# Altium PCB JUNORPCFrontv3.PcbDoc (part 1 of 2)
Units mil, origin at the board's own origin, x right, y up, seen from the top; angles counter-clockwise.
Board outline 3967.04 x 3967.04 mil, 8 copper layers (Top Layer, Internal Plane 1, Signal Layer 1, Internal Plane 2, Signal Layer 2, Internal Plane 3, Internal Plane 4, Bottom Layer), stack 66.304 mil thick; 289 components, 182 nets, 1049 pads, 357 vias.
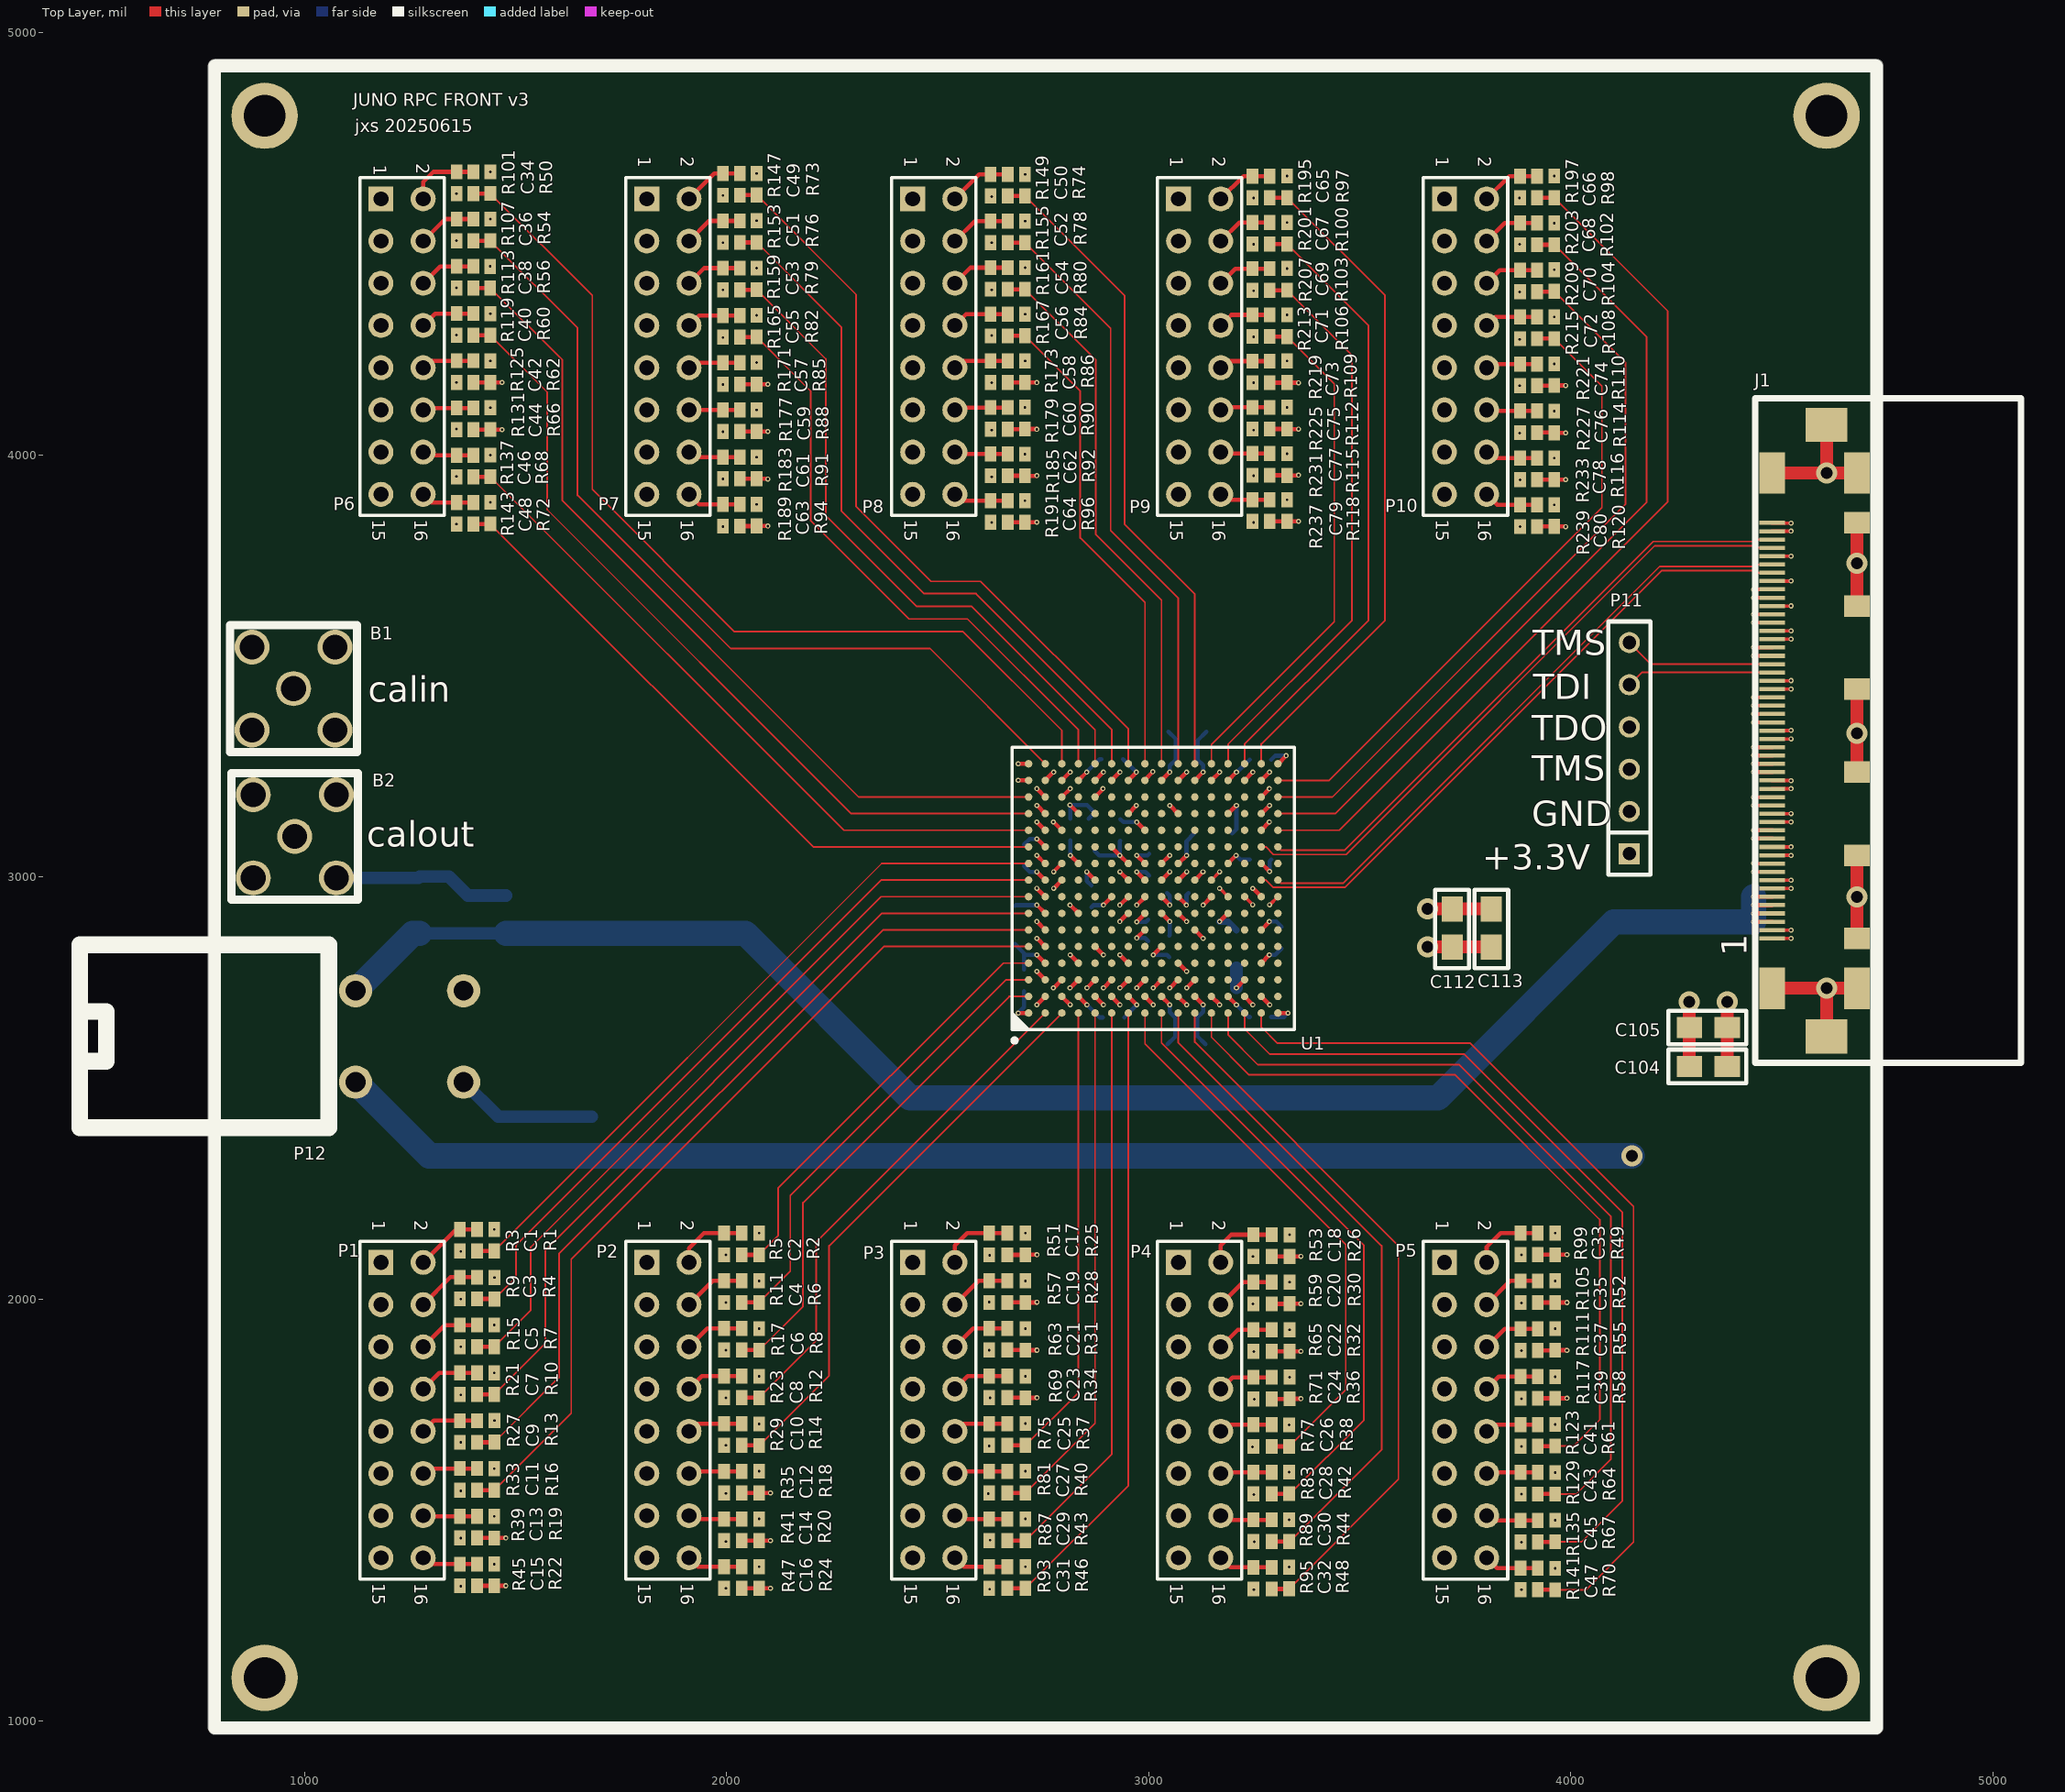
[diagram p0: Top Layer view]
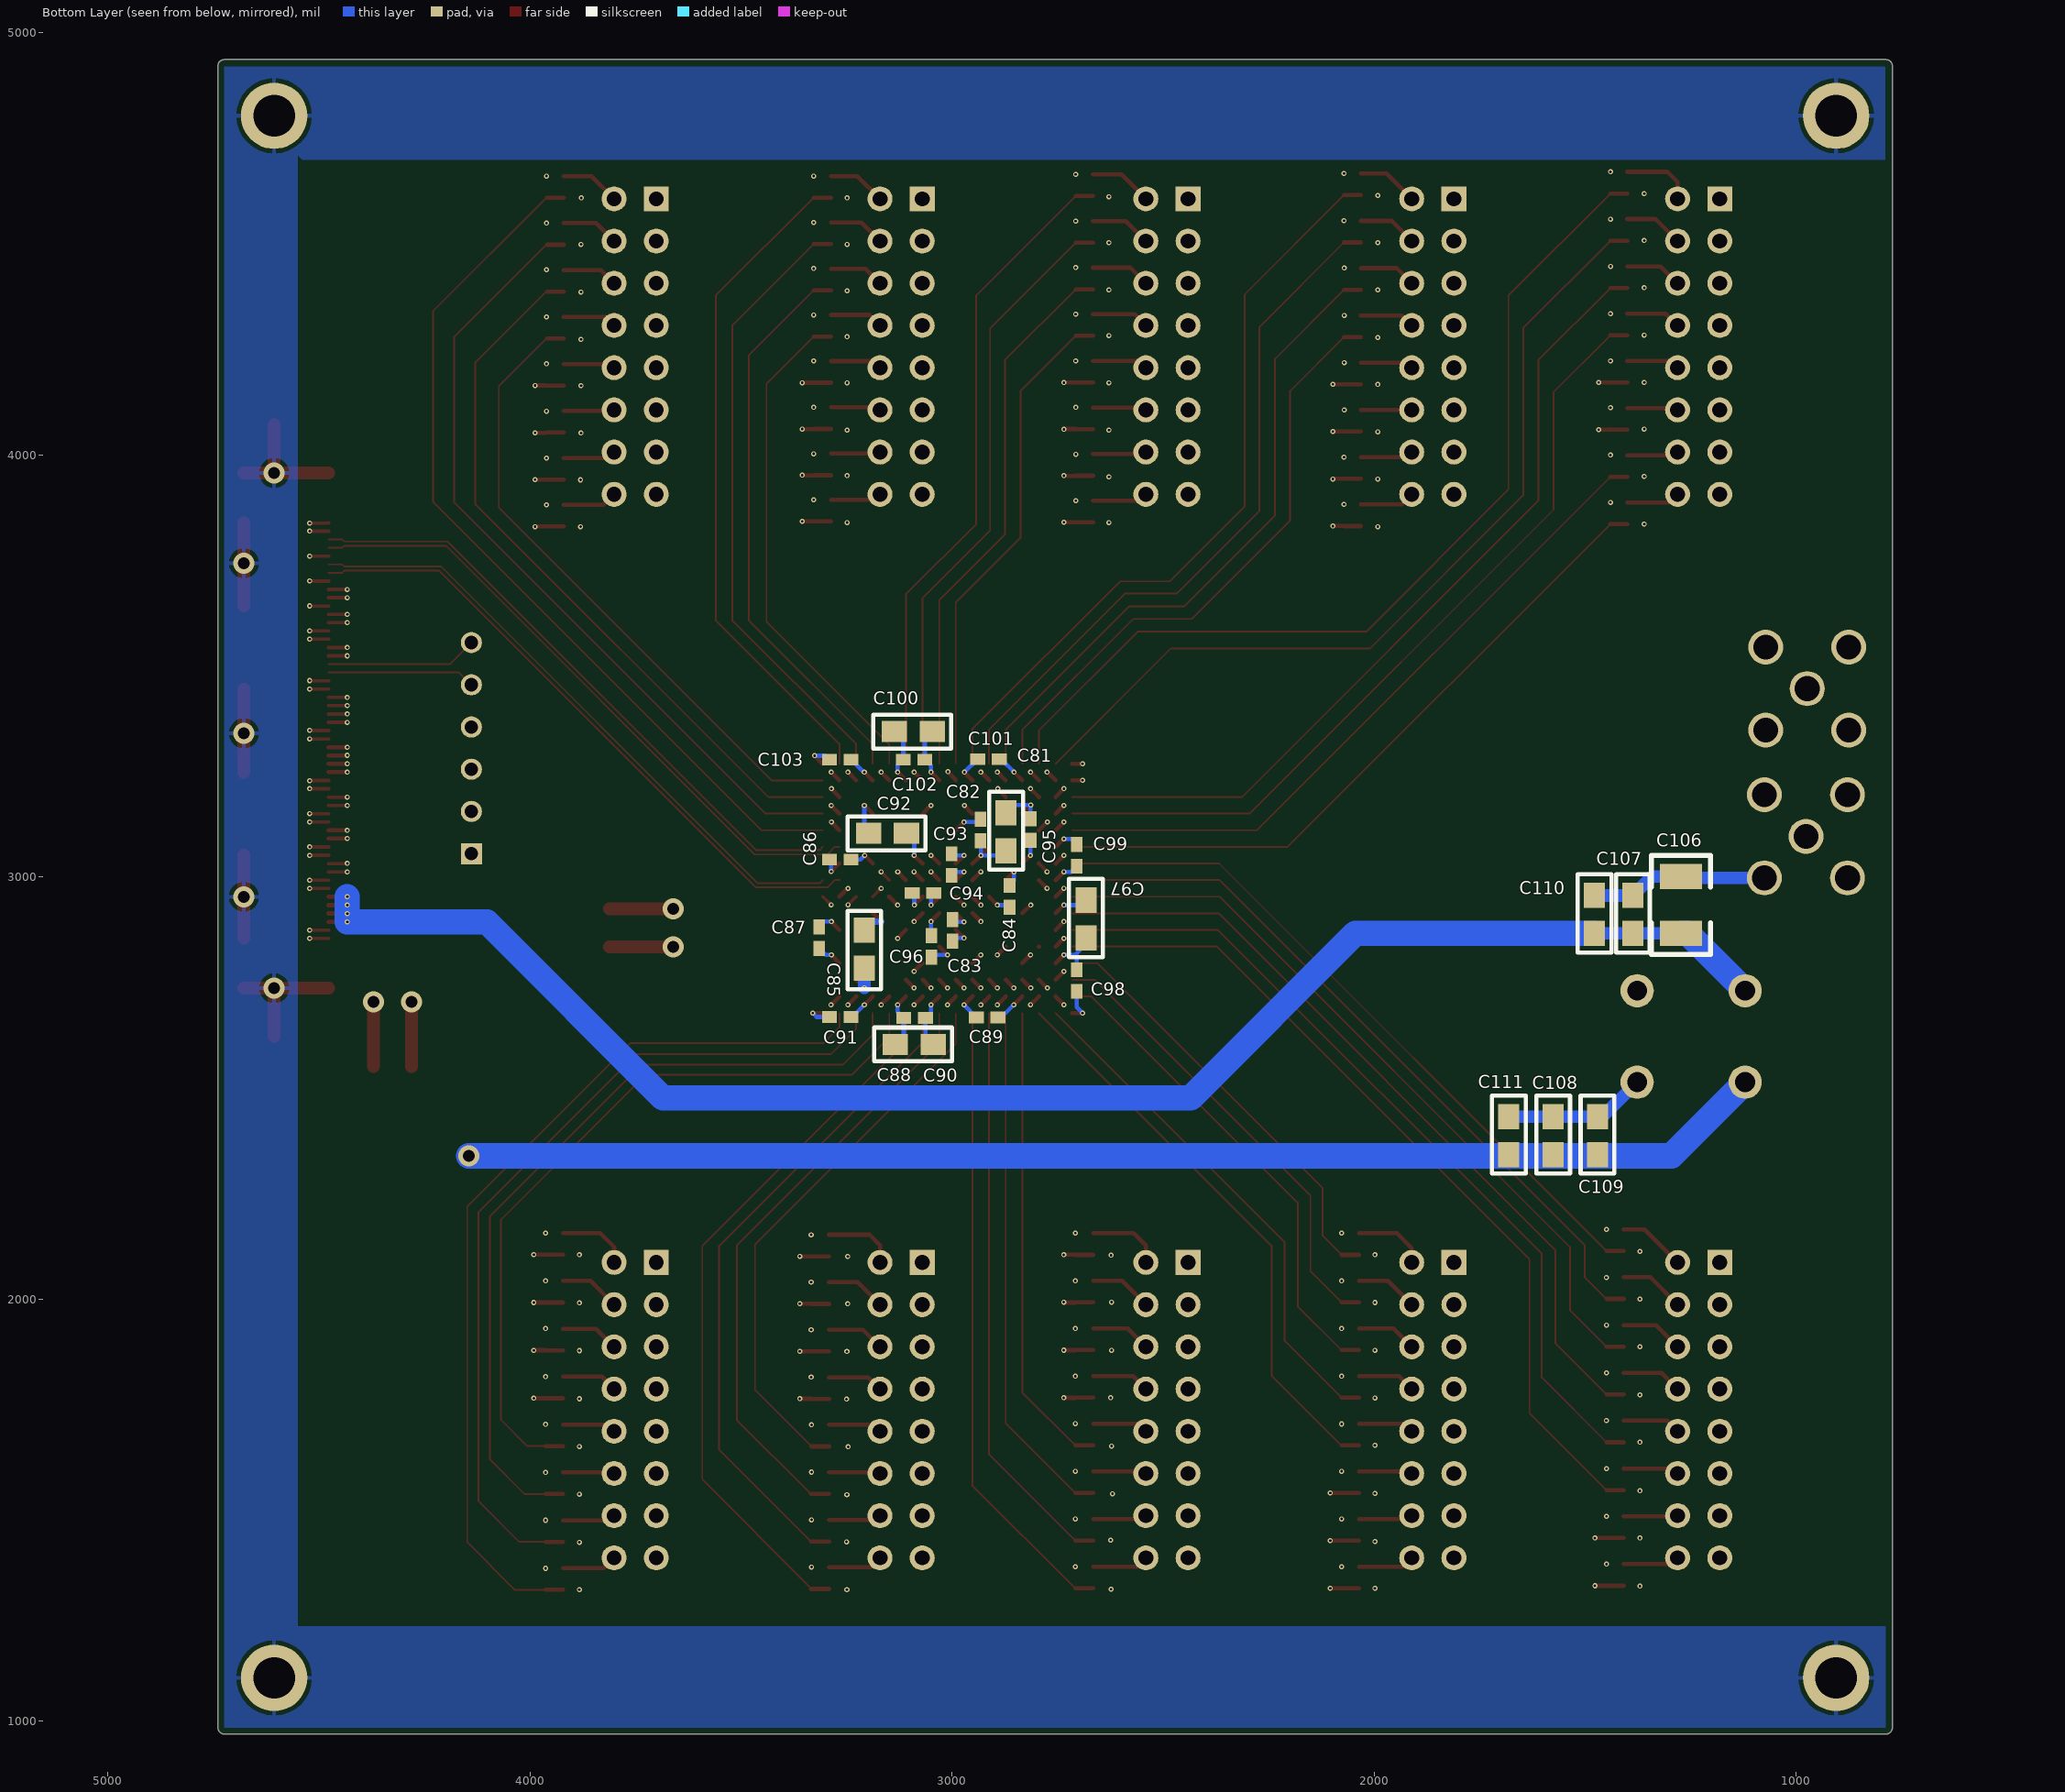
[diagram p1: Bottom Layer view, seen from below]
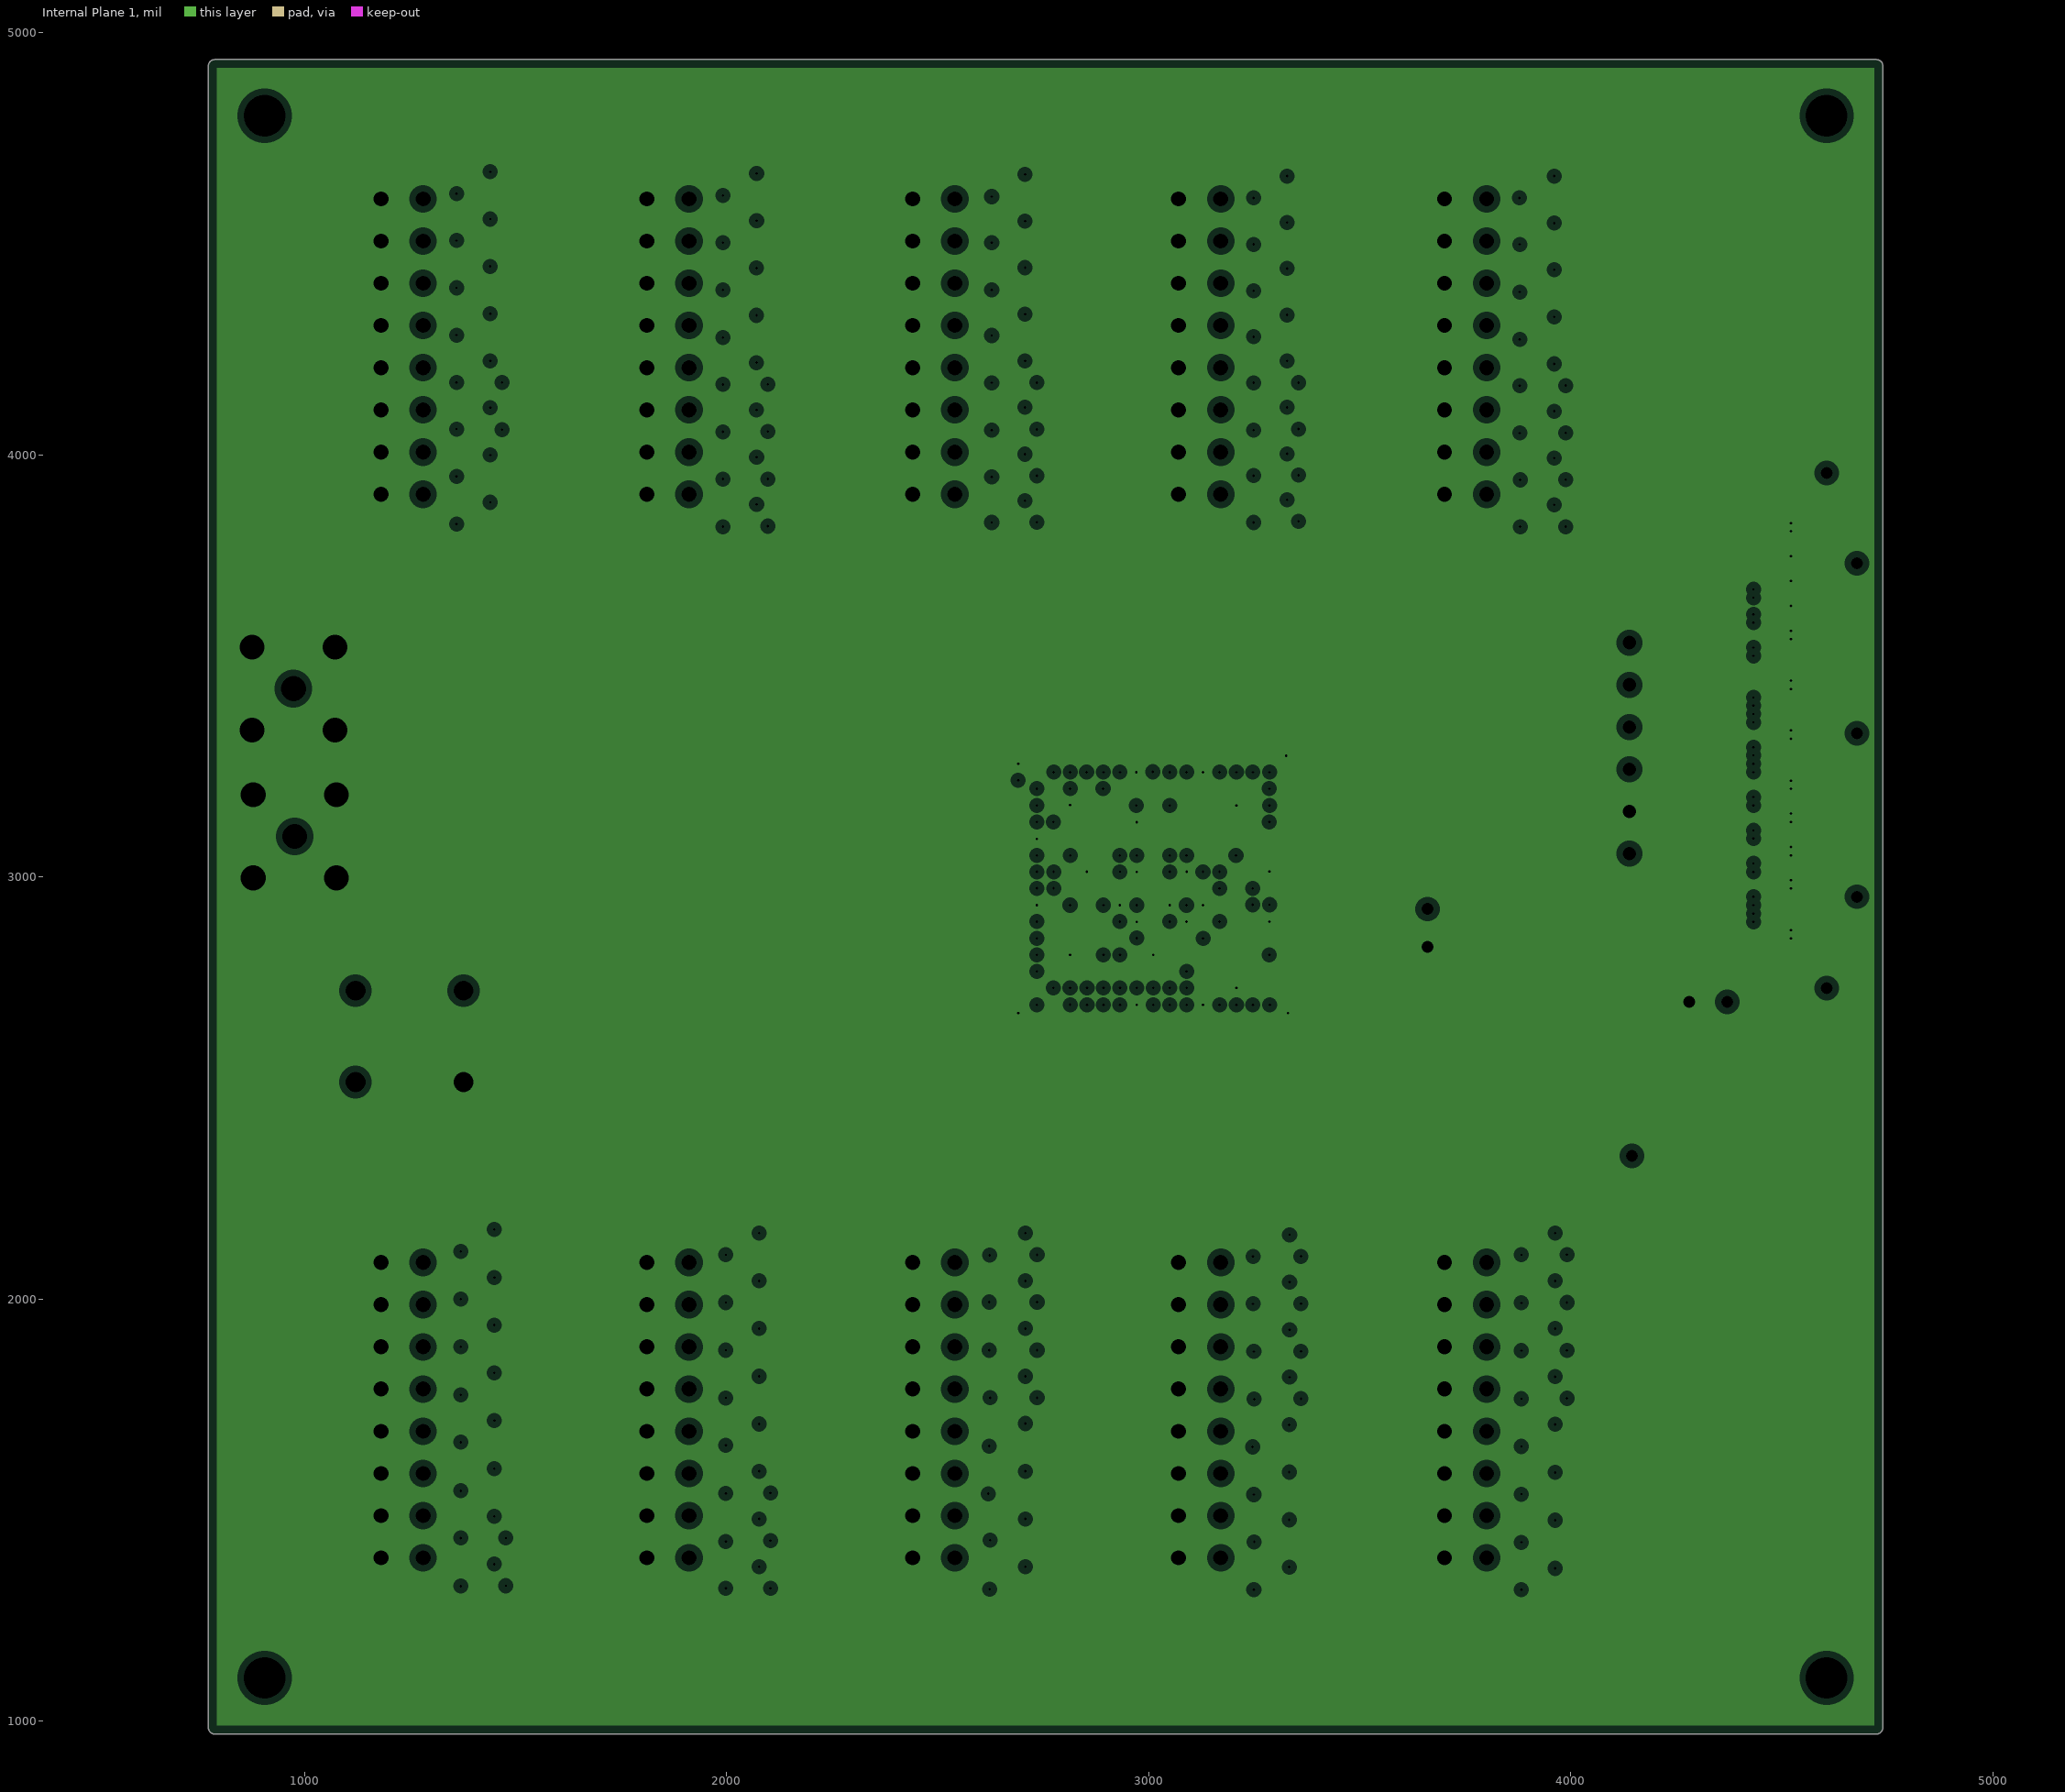
[diagram p2: Internal Plane 1, clearances drawn from the general rule]
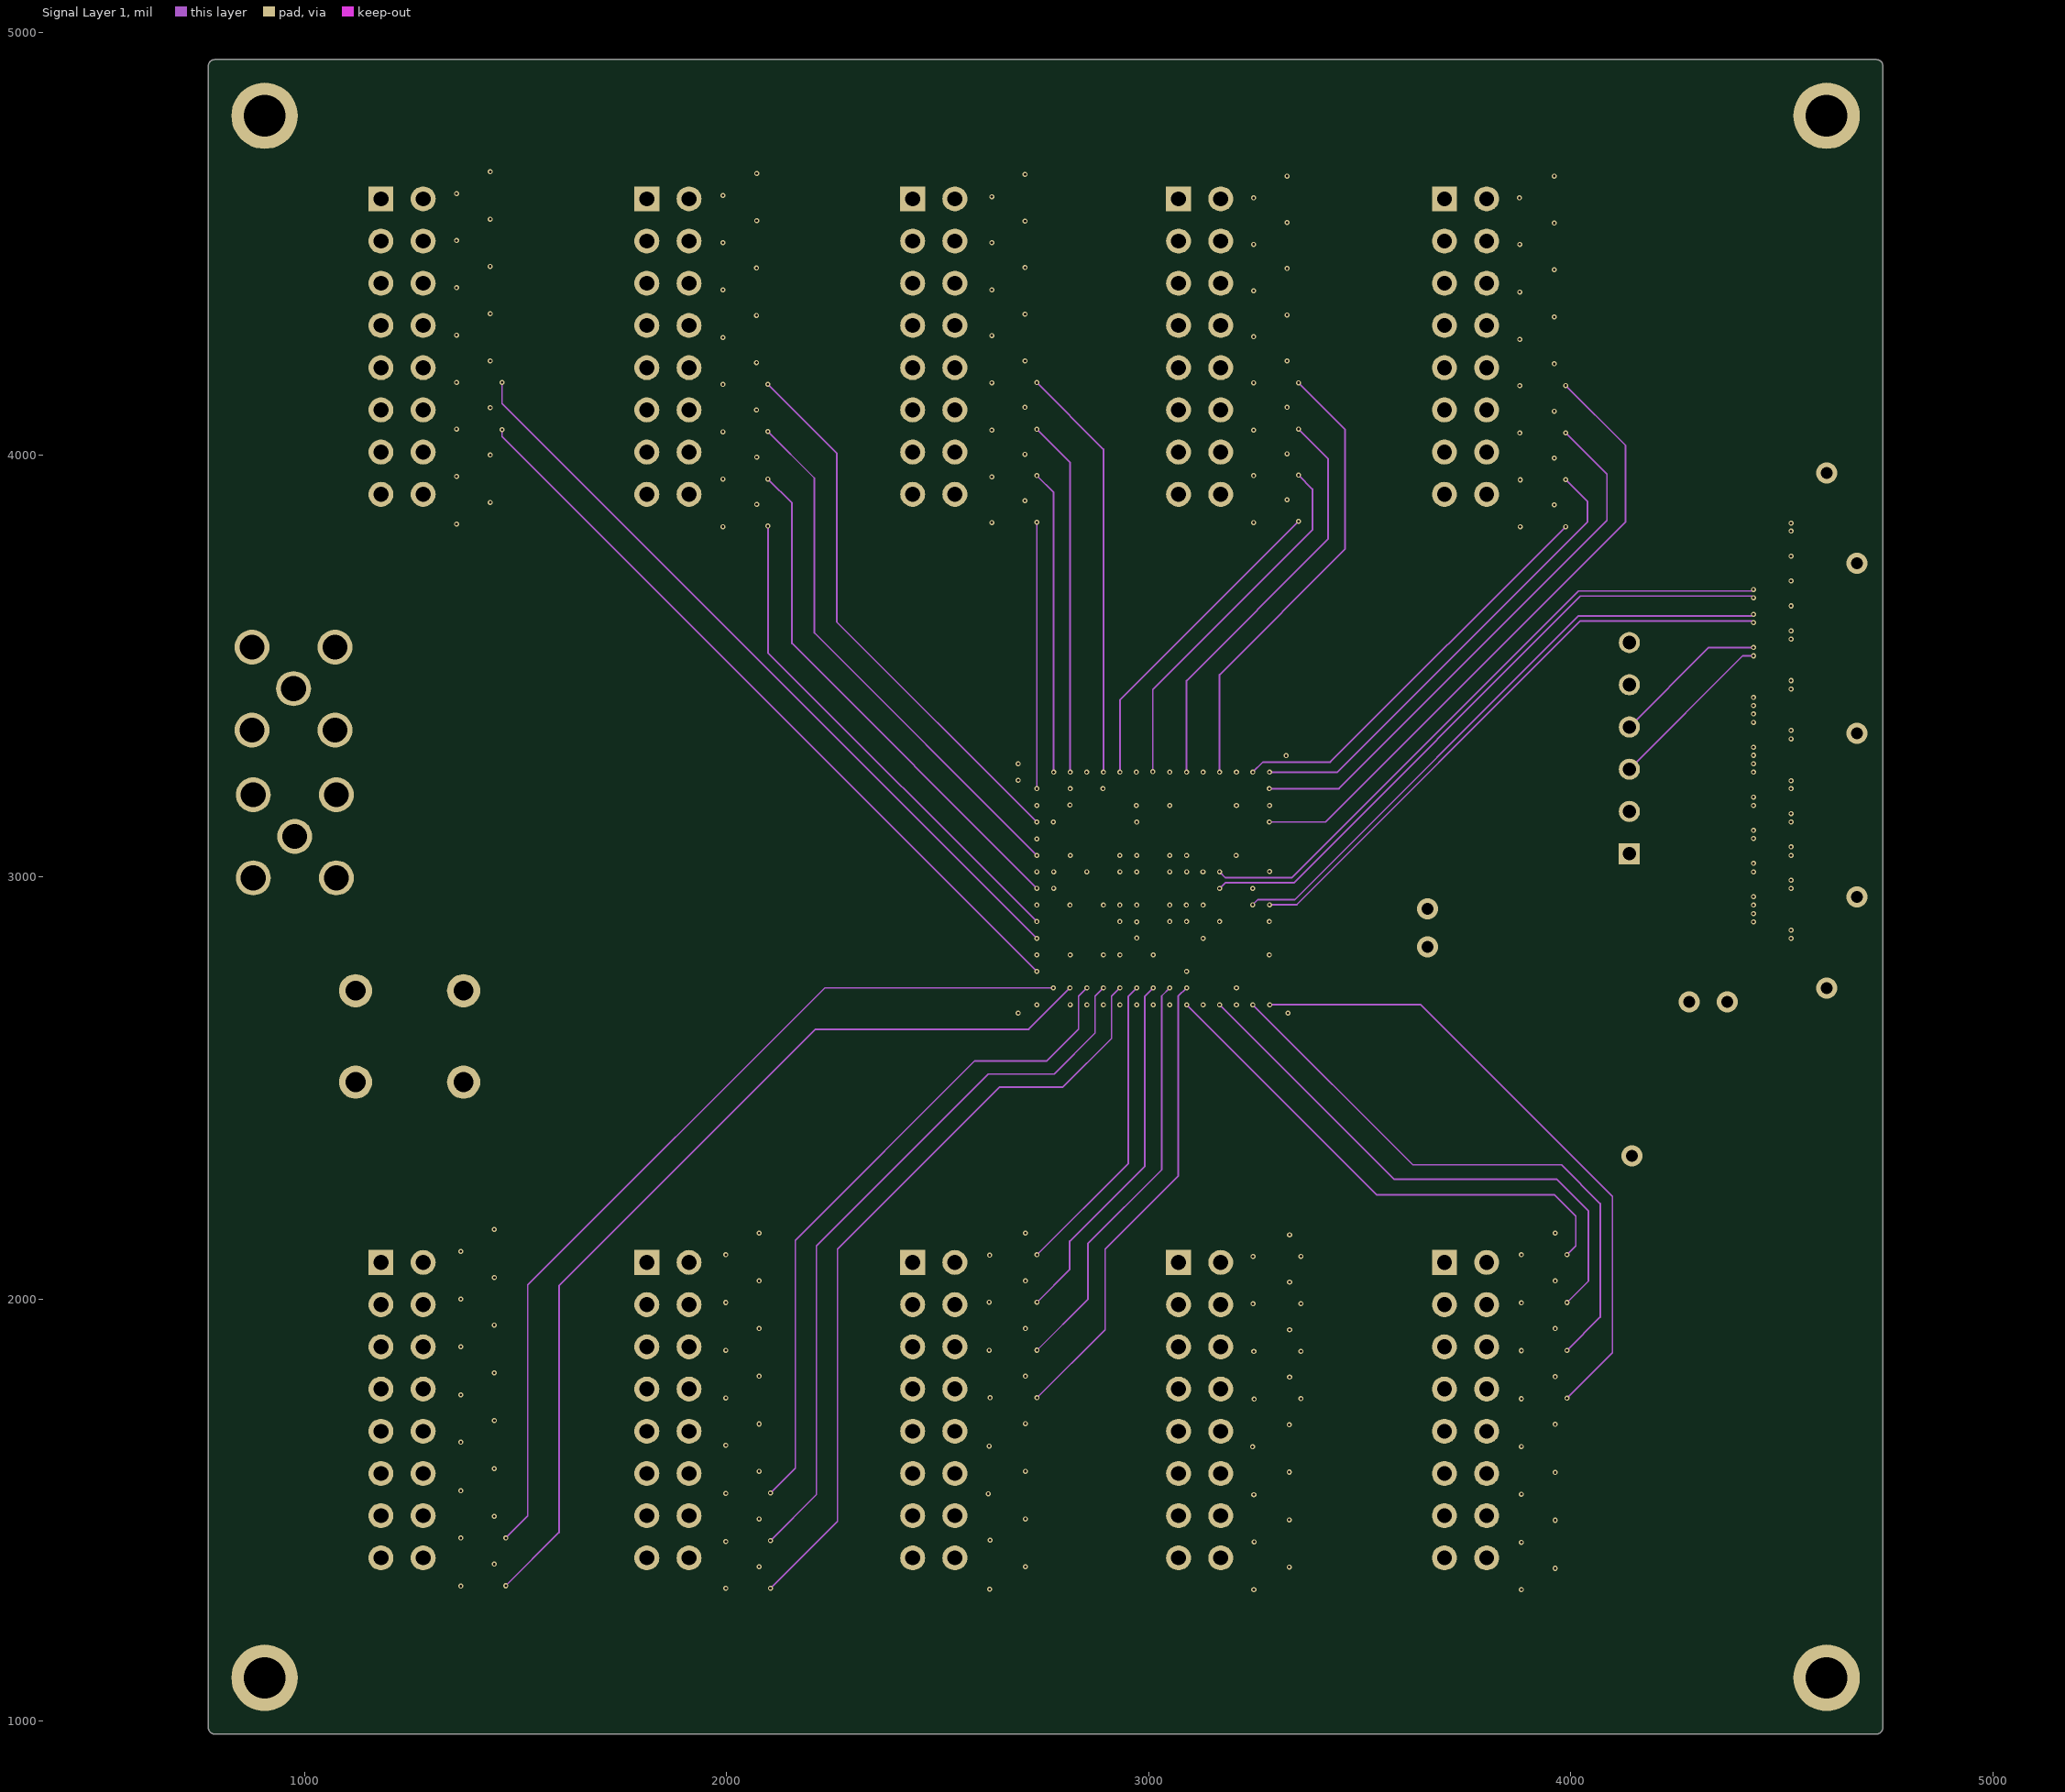
[diagram p3: Signal Layer 1]
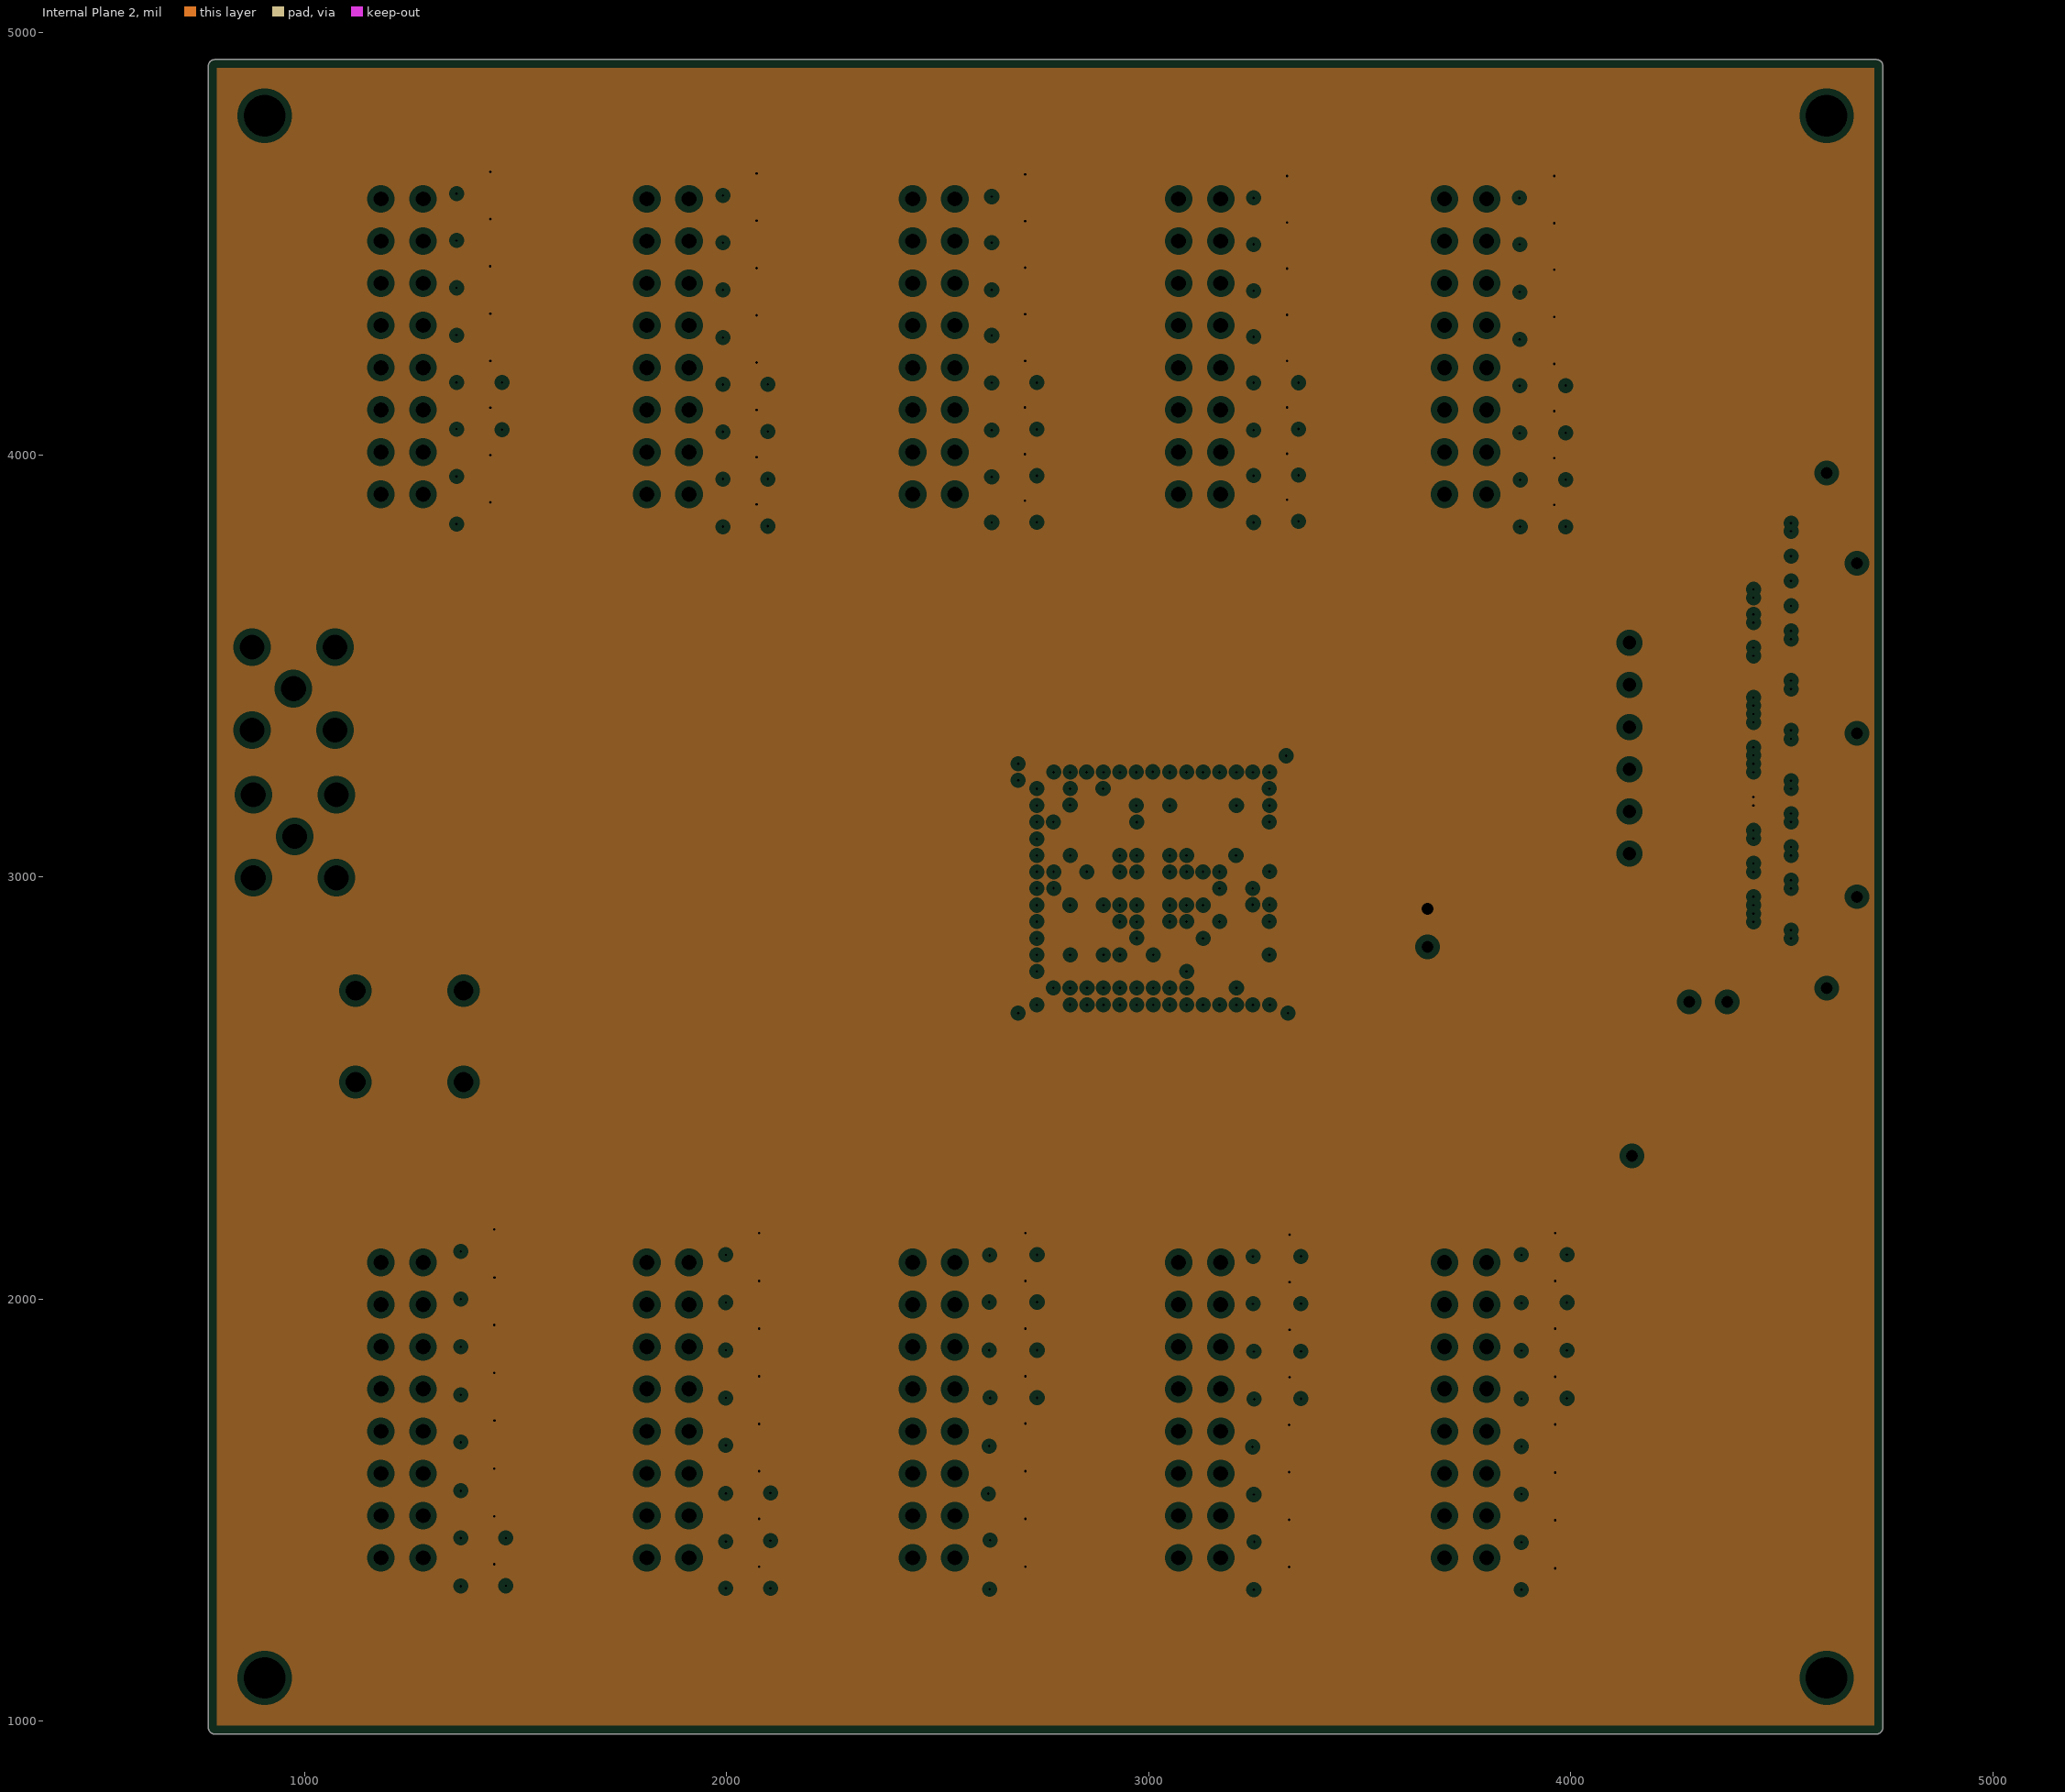
[diagram p4: Internal Plane 2, clearances drawn from the general rule]
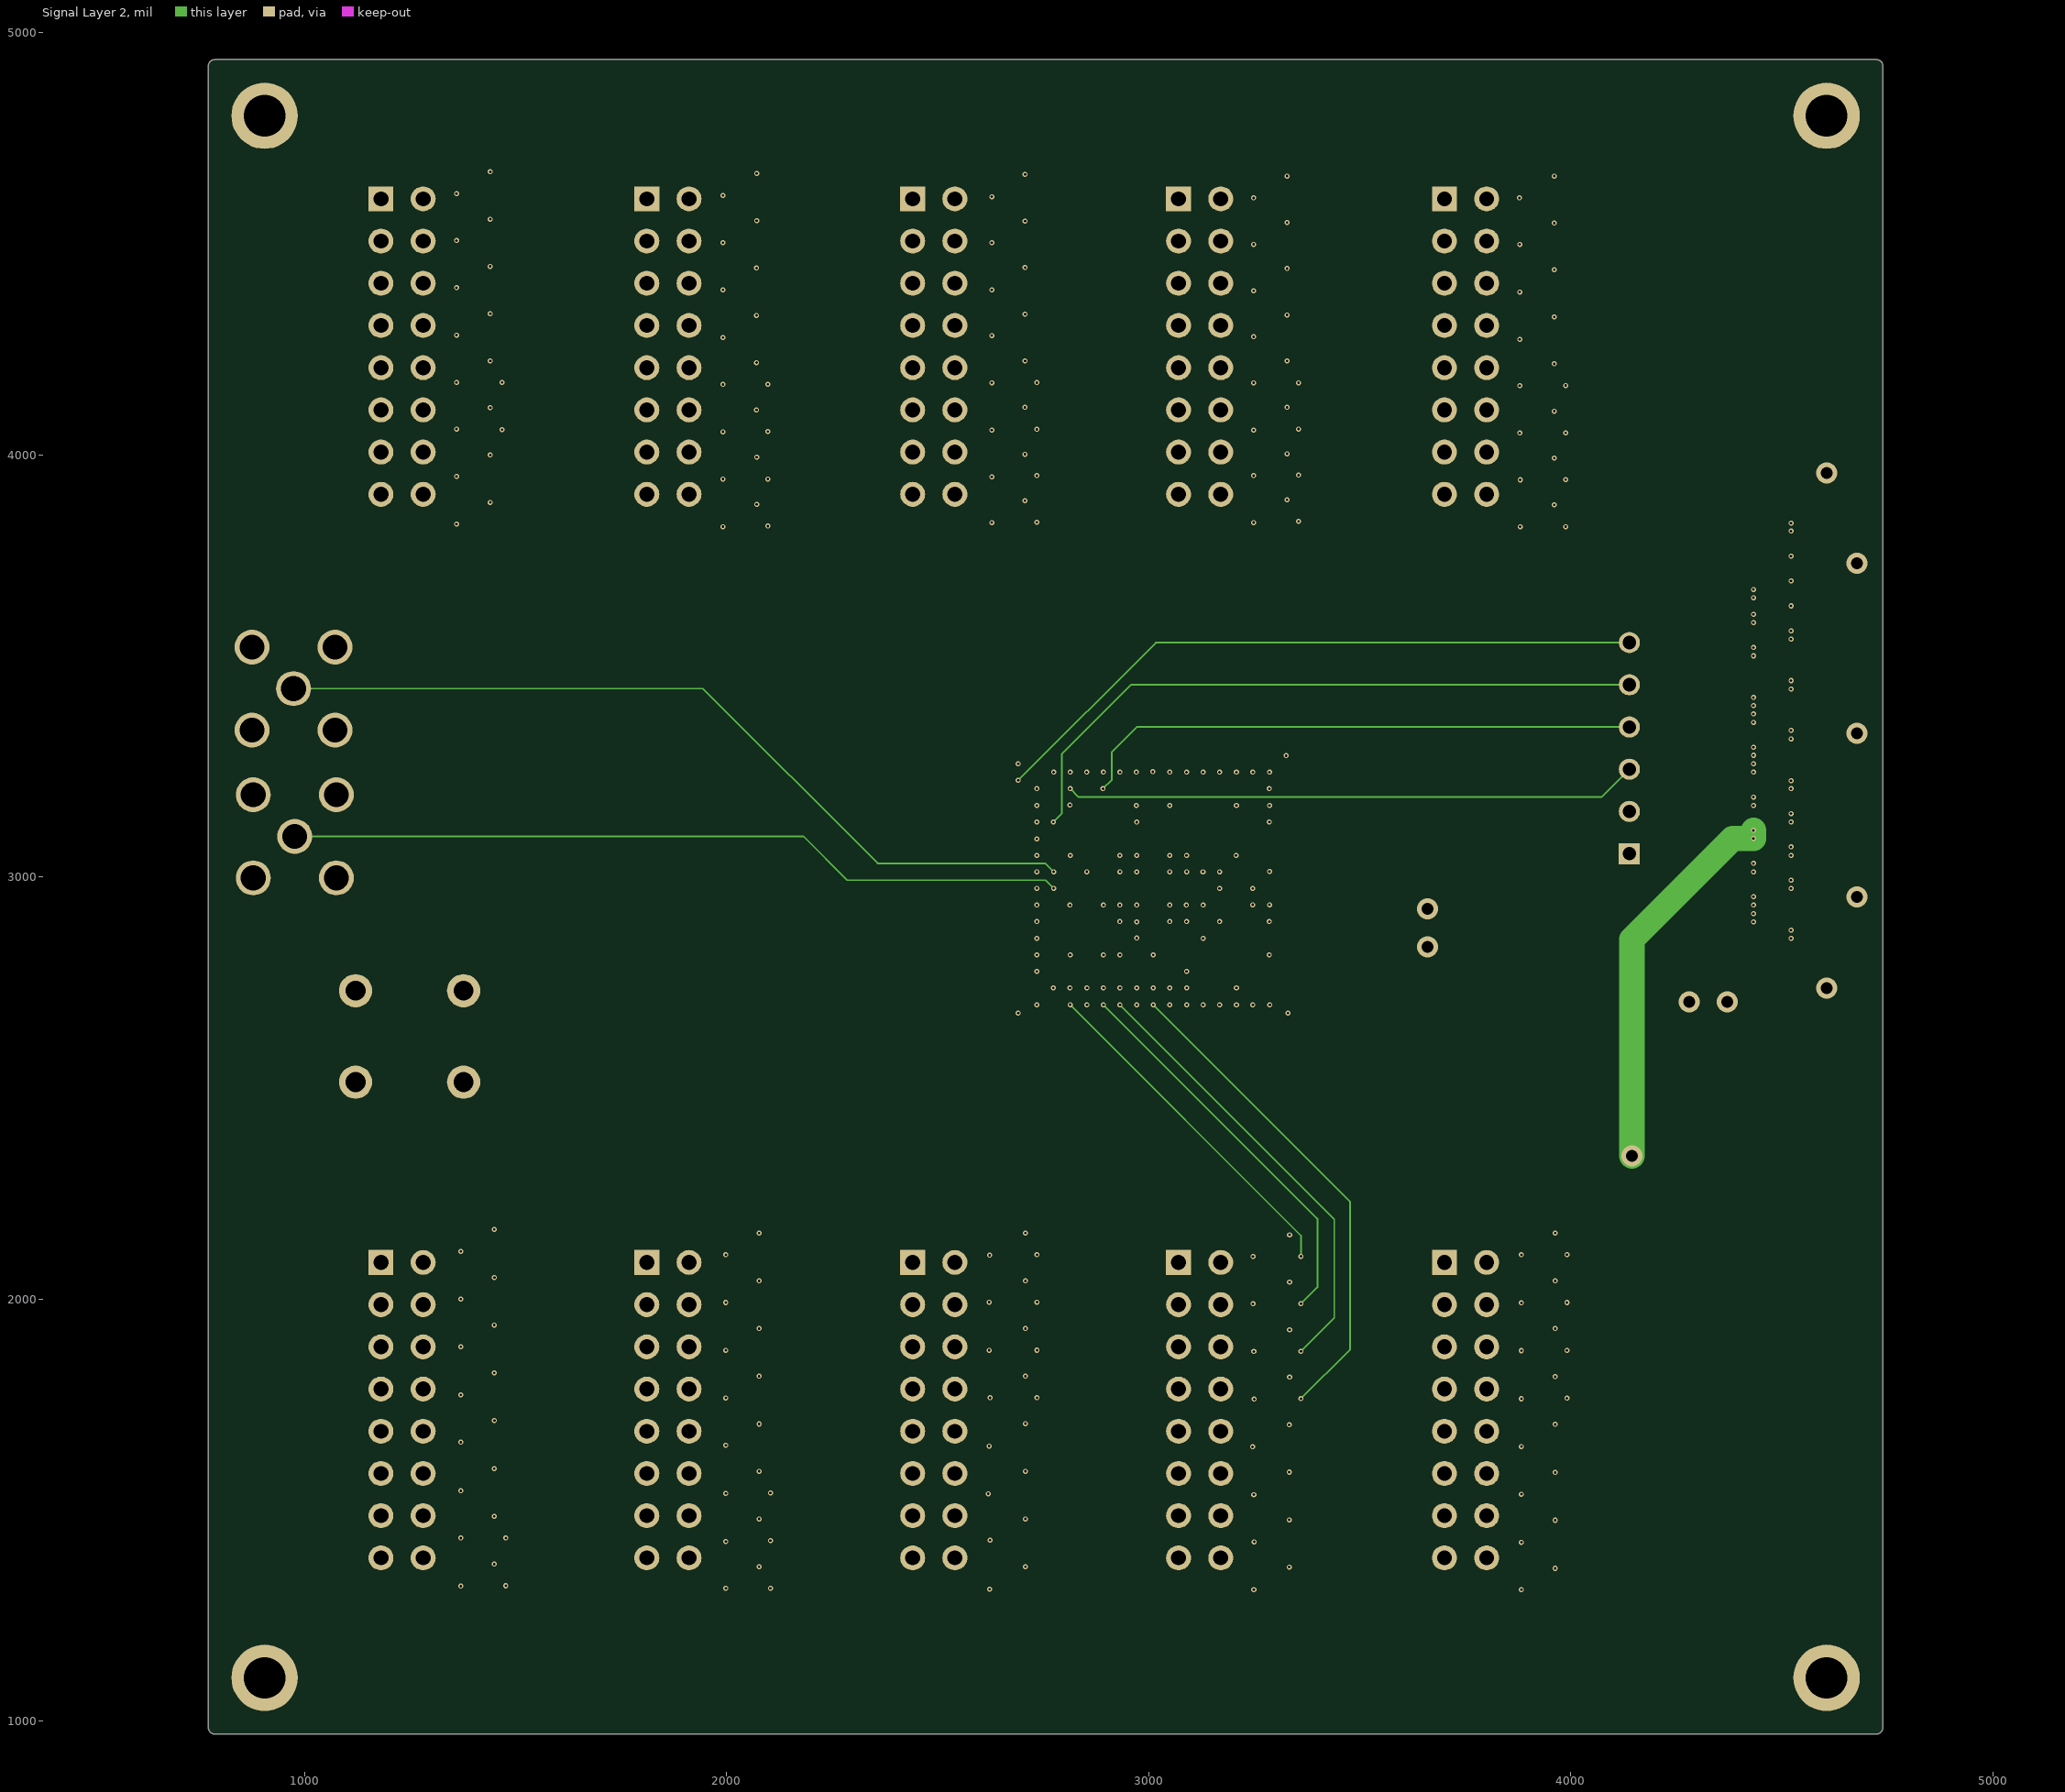
[diagram p5: Signal Layer 2]
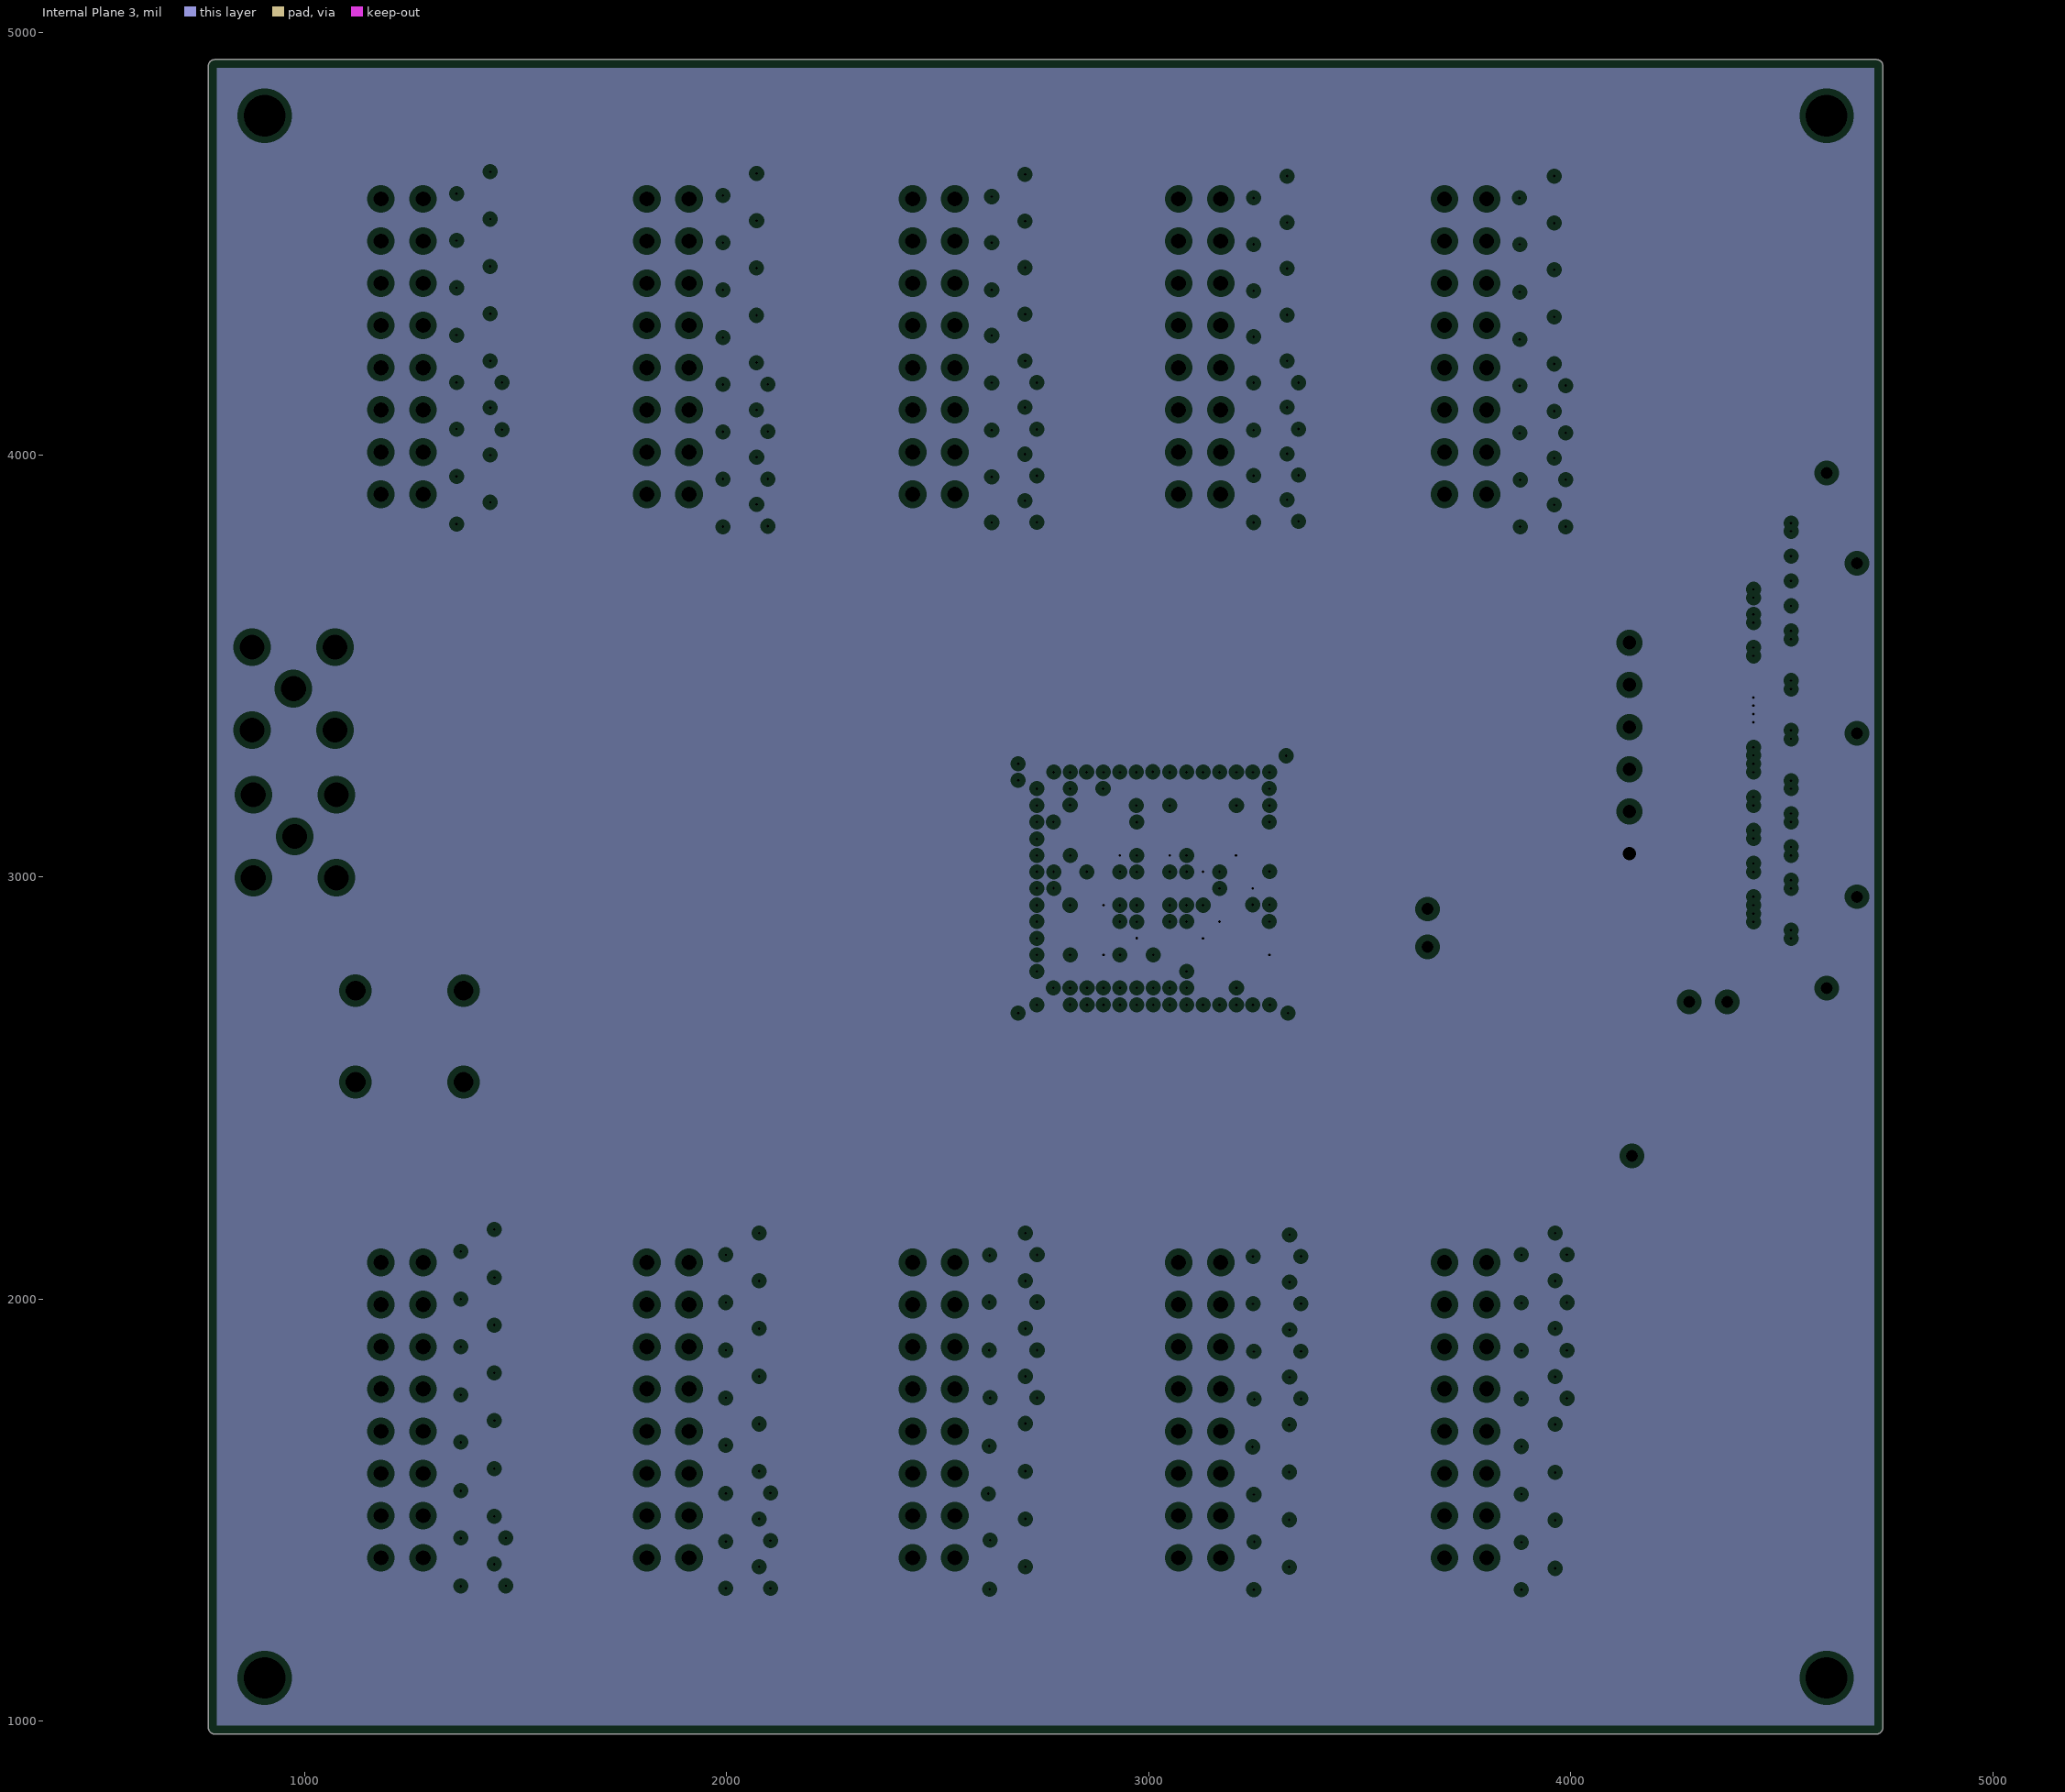
[diagram p6: Internal Plane 3, clearances drawn from the general rule]
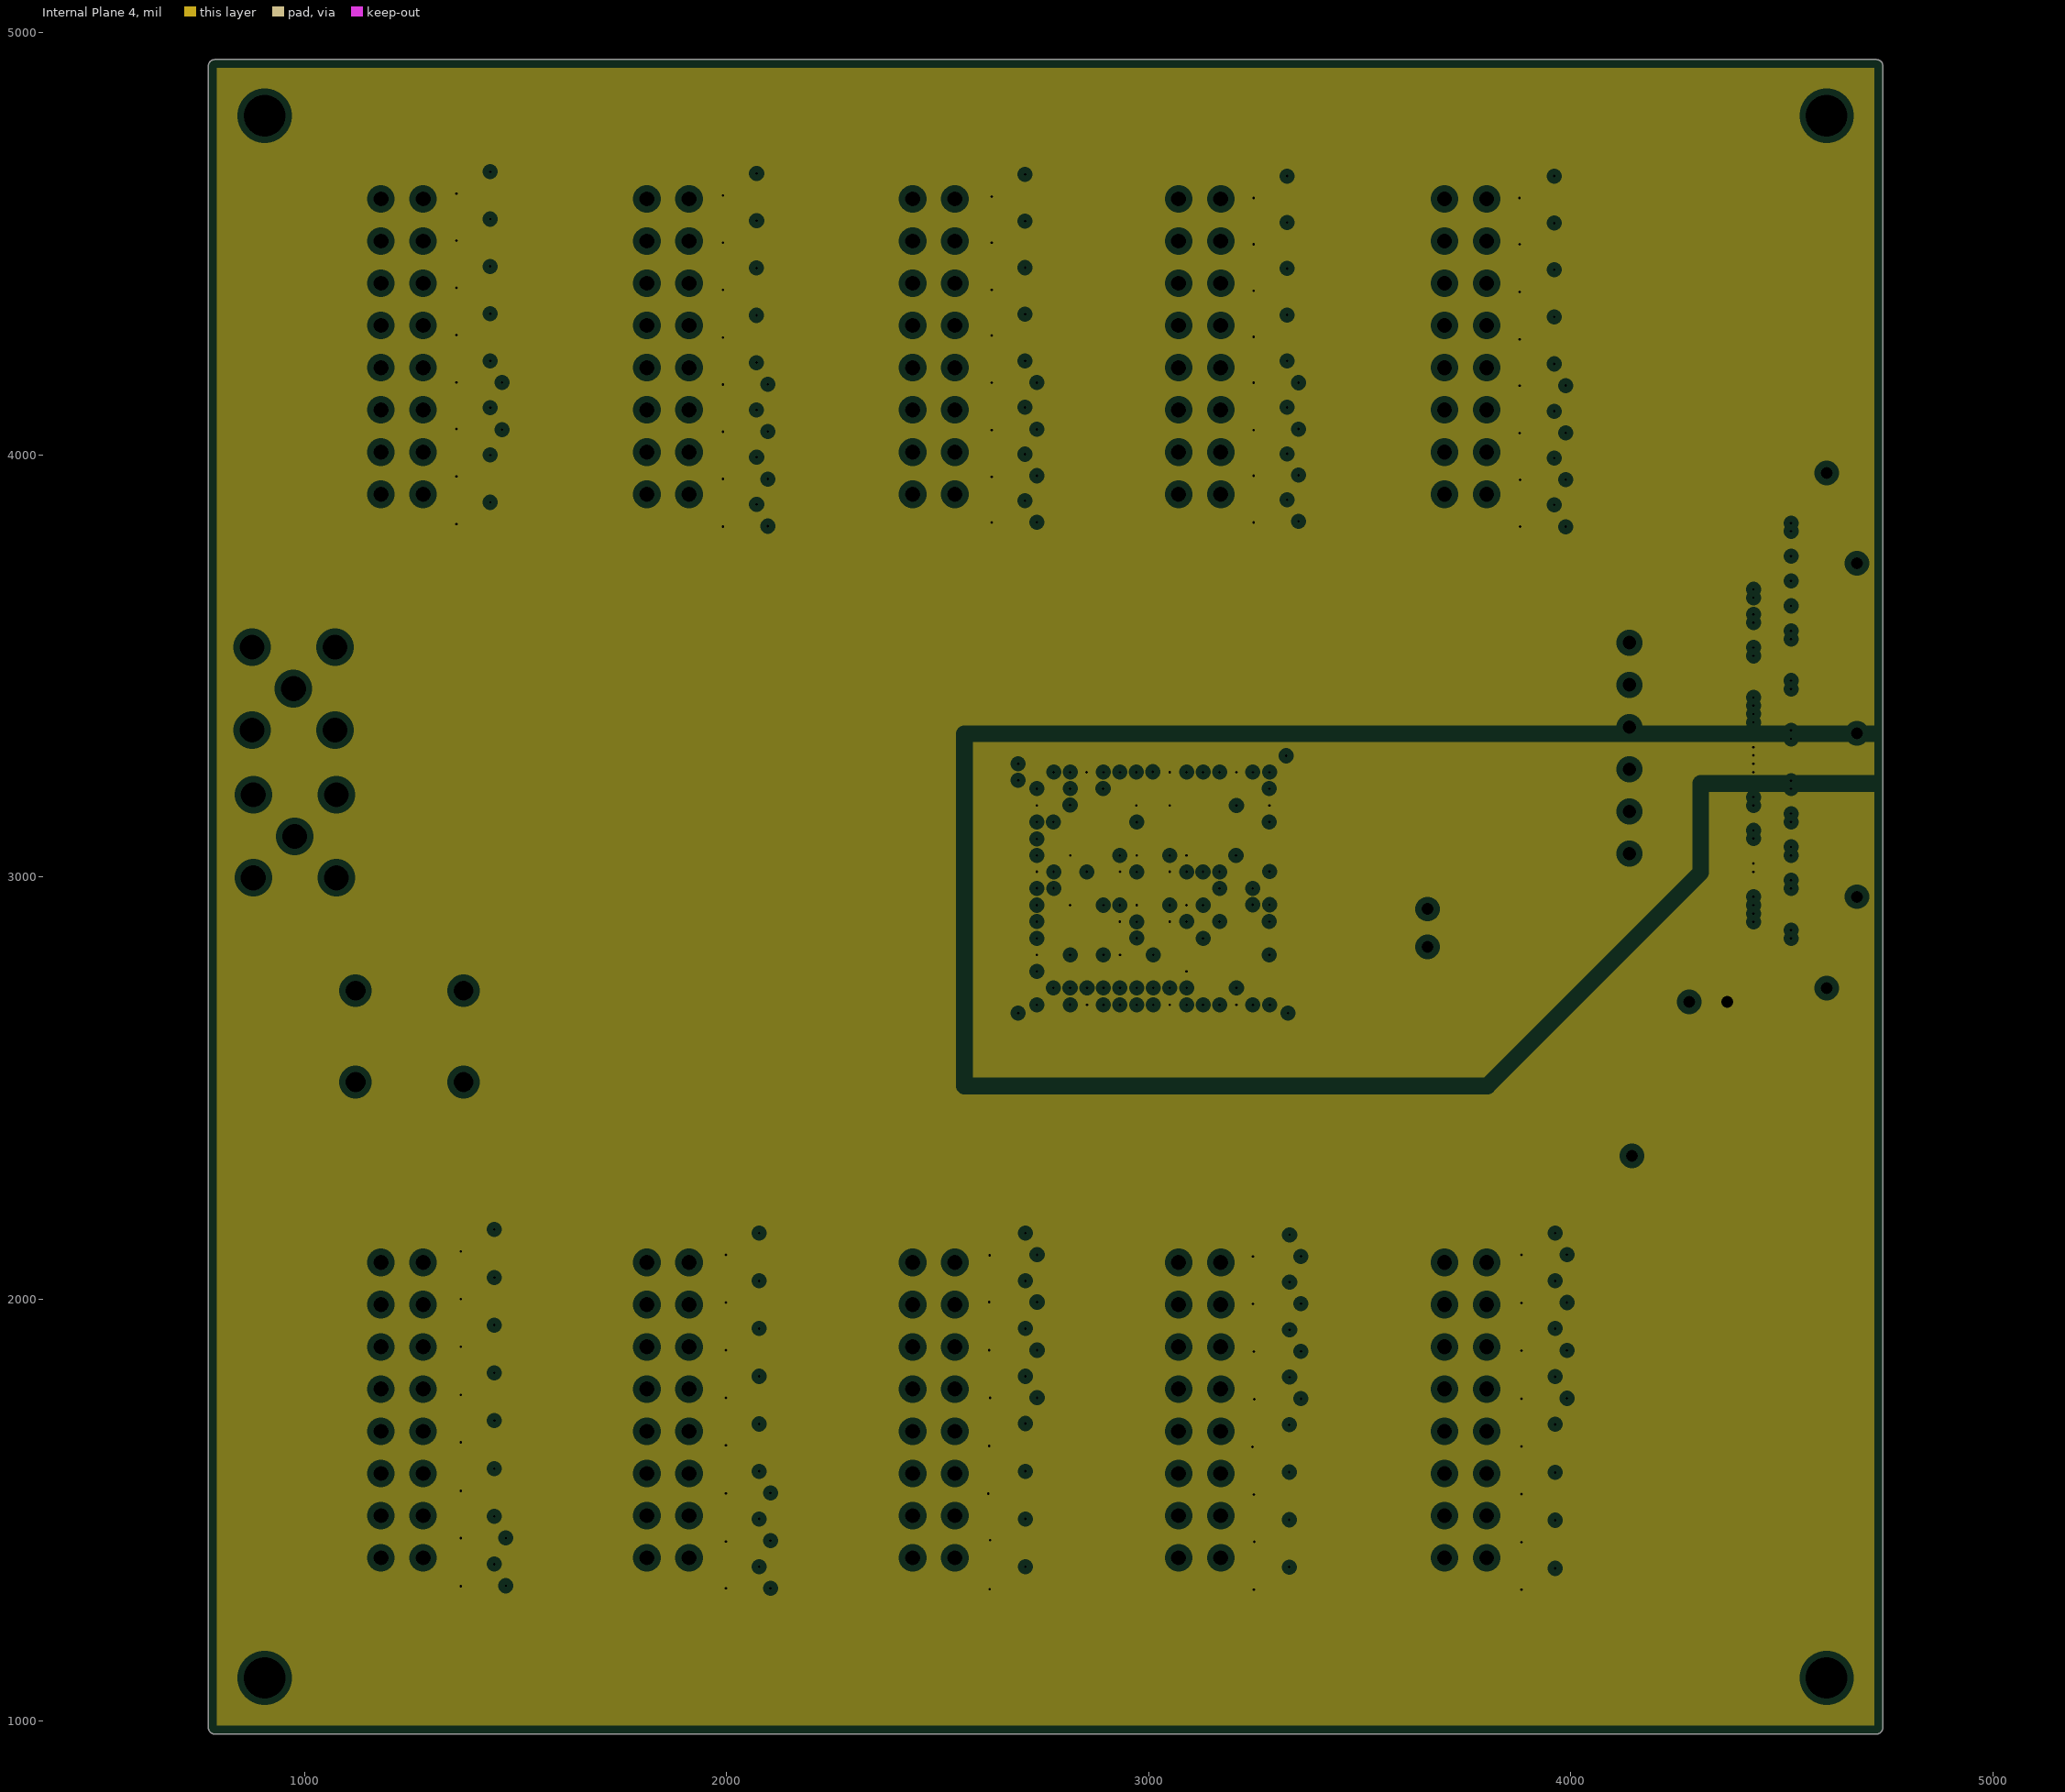
[diagram p7: Internal Plane 4, clearances drawn from the general rule]

## Layer stack, top to bottom
Top Solder: solder mask 0.4, Solder Resist, Dk 3.5
Top Layer: signal copper 1.4
Dielectric 1: core 10, FR-4, Dk 4.2
Internal Plane 1: plane copper 1.4173, net GND
Dielectric 3: prepreg 5, Dk 4.2
Signal Layer 1: signal copper 1.4173
Dielectric 4: core 10, Dk 4.2
Internal Plane 2: plane copper 1.4173, net Vbaseline
Dielectric 6: prepreg 5, Dk 4.2
Signal Layer 2: signal copper 1.4173
Dielectric 5: core 10, Dk 4.2
Internal Plane 3: plane copper 1.4173, net +3.3V
Dielectric 7: prepreg 5, Dk 4.2
Internal Plane 4: plane copper 1.4173, net -5.2V
Dielectric 2: core 10, Dk 4.2
Bottom Layer: signal copper 1.4
Bottom Solder: solder mask 0.4, Solder Resist, Dk 3.5

## Board outline
787.4,969.24 cw(c787.4,984.25) 772.39,984.25 772.39,4921.26 cw(c787.4,4921.26) 787.4,4936.27 4724.41,4936.27 cw(c4724.41,4921.26) 4739.42,4921.26 4739.42,984.25 cw(c4724.41,984.25) 4724.41,969.24

## Design rules (kind name [scope] priority, off if disabled: settings)
Clearance [All] p1: gap=0 ignorepadtopadclearanceinfootprint=FALSE
ComponentClearance [All] p1: gap=0 collisioncheckmode=3 verticalgap=0 showdistances=FALSE
DiffPairsRouting [All] p1: maxlimit=10 minlimit=6 mostfreqgap=8 toplayer_prefgap=6 toplayer_minwidth=4 toplayer_maxwidth=15 toplayer_prefwidth=15 midlayer1_mingap=8 midlayer1_minwidth=4 midlayer1_maxwidth=15 midlayer1_prefwidth=15 midlayer2_mingap=8 midlayer2_minwidth=4 midlayer2_maxwidth=15 midlayer2_prefwidth=15 bottomlayer_prefgap=6 bottomlayer_minwidth=4 bottomlayer_maxwidth=15 bottomlayer_prefwidth=15 maxuncoupledlength=500
HoleToHoleClearance [All] p1: gap=0 allowstackedmicrovias=TRUE
MinimumSolderMaskSliver [All] p1: minsoldermaskwidth=0
PlaneClearance [All] p1: clearance=15
PlaneConnect [All] p1: planeconnectstyle=Direct reliefexpansion=20 reliefentries=4 reliefconductorwidth=10 reliefairgap=10
PolygonConnect [All] p1: connectstyle=Relief reliefconductorwidth=10 reliefentries=4 polygonreliefangle="90 Angle" airgapwidth=10
RoutingVias [All] p1: holewidth=6 width=12 viastyle="Through Hole" minholewidth=6 minwidth=12 maxholewidth=28 maxwidth=50
SilkToSilkClearance [All] p1: silktosilkclearance=0
SilkToSolderMaskClearance [IsPad] p1: minsilkscreentomaskgap=0 clearancetoexposedcopper=TRUE
SolderMaskExpansion [All] p1: expansion=4
Width [All] p1: maxlimit=100 minlimit=4 preferedwidth=10 minimp=50.000000 maximp=50.000000 favimp=50.000000
22 further rules are at their usual default settings.

## Classes and differential pairs
component class main: B1 B2 C104 C105 C106 C107 C108 C109 C110 C111 C112 C113 J1 P12
component class XC6SLX09-2FTG256C: C81 C82 C83 C84 C85 C86 C87 C88 C89 C90 C91 C92 C93 C94 C95 C96 C97 C98 C99 C100 C101 C102 C103 P11 U1
component class input5: C65 C66 C67 C68 C69 C70 C71 C72 C73 C74 C75 C76 C77 C78 C79 C80 P9 P10 R97 R98 R100 R102 R103 R104 R106 R108 R109 R110 R112 R114 R115 R116 R118 R120 R195 R197 R201 R203 R207 R209 R213 R215 R219 R221 R225 R227 R231 R233 R237 R239
component class input4: C49 C50 C51 C52 C53 C54 C55 C56 C57 C58 C59 C60 C61 C62 C63 C64 P7 P8 R73 R74 R76 R78 R79 R80 R82 R84 R85 R86 R88 R90 R91 R92 R94 R96 R147 R149 R153 R155 R159 R161 R165 R167 R171 R173 R177 R179 R183 R185 R189 R191
component class input3: C33 C34 C35 C36 C37 C38 C39 C40 C41 C42 C43 C44 C45 C46 C47 C48 P5 P6 R49 R50 R52 R54 R55 R56 R58 R60 R61 R62 R64 R66 R67 R68 R70 R72 R99 R101 R105 R107 R111 R113 R117 R119 R123 R125 R129 R131 R135 R137 R141 R143
component class input2: C17 C18 C19 C20 C21 C22 C23 C24 C25 C26 C27 C28 C29 C30 C31 C32 P3 P4 R25 R26 R28 R30 R31 R32 R34 R36 R37 R38 R40 R42 R43 R44 R46 R48 R51 R53 R57 R59 R63 R65 R69 R71 R75 R77 R81 R83 R87 R89 R93 R95
component class input1: C1 C2 C3 C4 C5 C6 C7 C8 C9 C10 C11 C12 C13 C14 C15 C16 P1 P2 R1 R2 R3 R4 R5 R6 R7 R8 R9 R10 R11 R12 R13 R14 R15 R16 R17 R18 R19 R20 R21 R22 R23 R24 R27 R29 R33 R35 R39 R41 R45 R47
differential pair RESET_LVDS33: +RESET_LVDS33_P -RESET_LVDS33_N
differential pair FB_LVDS33: +FB_LVDS33_P -FB_LVDS33_N
differential pair DATA_LVDS33: +DATA_LVDS33_P -DATA_LVDS33_N
differential pair CLK_LVDS33: +CLK_LVDS33_P -CLK_LVDS33_N

## Components (designator, comment, footprint, x,y, rotation, side; value= is the part's Value field where it differs from the comment)
B1 "SMA" SMA_2 974,3446 r0 top locked
B2 "SMA" SMA_2 977,3096 r0 top locked
C1 "jc1.0" 0402 1408.93,2139.18 r270 top value=0.1uF
C2 "jc1.0" 0402 2035.59,2130.18 r270 top value=0.1uF
C3 "jc1.0" 0402 1408.93,2025.9 r270 top value=0.1uF
C4 "jc1.0" 0402 2035.59,2017.32 r270 top value=0.1uF
C5 "jc1.0" 0402 1408.93,1912.61 r270 top value=0.1uF
C6 "jc1.0" 0402 2035.59,1904.47 r270 top value=0.1uF
C7 "jc1.0" 0402 1408.93,1799.32 r270 top value=0.1uF
C8 "jc1.0" 0402 2035.59,1791.61 r270 top value=0.1uF
C9 "jc1.0" 0402 1408.93,1686.04 r270 top value=0.1uF
C10 "jc1.0" 0402 2035.59,1678.75 r270 top value=0.1uF
C11 "jc1.0" 0402 1408.93,1572.75 r270 top value=0.1uF
C12 "jc1.0" 0402 2035.59,1565.9 r270 top value=0.1uF
C13 "jc1.0" 0402 1408.93,1459.47 r270 top value=0.1uF
C14 "jc1.0" 0402 2035.59,1453.04 r270 top value=0.1uF
C15 "jc1.0" 0402 1408.93,1346.18 r270 top value=0.1uF
C16 "jc1.0" 0402 2035.59,1340.18 r270 top value=0.1uF
C17 "jc1.0" 0402 2665.26,2130.18 r270 top value=0.1uF
C18 "jc1.0" 0402 3291.59,2126.59 r270 top value=0.1uF
C19 "jc1.0" 0402 2665.26,2017.32 r270 top value=0.1uF
C20 "jc1.0" 0402 3291.59,2014.02 r270 top value=0.1uF
C21 "jc1.0" 0402 2665.26,1904.47 r270 top value=0.1uF
C22 "jc1.0" 0402 3291.59,1901.45 r270 top value=0.1uF
C23 "jc1.0" 0402 2665.26,1791.61 r270 top value=0.1uF
C24 "jc1.0" 0402 3291.59,1788.88 r270 top value=0.1uF
C25 "jc1.0" 0402 2665.26,1678.75 r270 top value=0.1uF
C26 "jc1.0" 0402 3291.59,1676.3 r270 top value=0.1uF
C27 "jc1.0" 0402 2665.26,1565.9 r270 top value=0.1uF
C28 "jc1.0" 0402 3291.59,1563.73 r270 top value=0.1uF
C29 "jc1.0" 0402 2665.26,1453.04 r270 top value=0.1uF
C30 "jc1.0" 0402 3291.59,1451.16 r270 top value=0.1uF
C31 "jc1.0" 0402 2665.26,1340.18 r270 top value=0.1uF
C32 "jc1.0" 0402 3291.59,1338.59 r270 top value=0.1uF
C33 "jc1.0" 0402 3922.26,2130.59 r270 top value=0.1uF
C34 "jc1.0" 0402 1400.26,4644.55 r270 top value=0.1uF
C35 "jc1.0" 0402 3922.26,2017.16 r270 top value=0.1uF
C36 "jc1.0" 0402 1400.26,4532.69 r270 top value=0.1uF
C37 "jc1.0" 0402 3922.26,1903.73 r270 top value=0.1uF
C38 "jc1.0" 0402 1400.26,4420.84 r270 top value=0.1uF
C39 "jc1.0" 0402 3922.26,1790.3 r270 top value=0.1uF
C40 "jc1.0" 0402 1400.26,4308.98 r270 top value=0.1uF
C41 "jc1.0" 0402 3922.26,1676.88 r270 top value=0.1uF
C42 "jc1.0" 0402 1400.26,4197.12 r270 top value=0.1uF
C43 "jc1.0" 0402 3922.26,1563.45 r270 top value=0.1uF
C44 "jc1.0" 0402 1400.26,4085.27 r270 top value=0.1uF
C45 "jc1.0" 0402 3922.26,1450.02 r270 top value=0.1uF
C46 "jc1.0" 0402 1400.26,3973.41 r270 top value=0.1uF
C47 "jc1.0" 0402 3922.26,1336.59 r270 top value=0.1uF
C48 "jc1.0" 0402 1400.26,3861.55 r270 top value=0.1uF
C49 "jc1.0" 0402 2031.26,4640.55 r270 top value=0.1uF
C50 "jc1.0" 0402 2666.26,4638.55 r270 top value=0.1uF
C51 "jc1.0" 0402 2031.26,4528.55 r270 top value=0.1uF
C52 "jc1.0" 0402 2666.26,4528.12 r270 top value=0.1uF
C53 "jc1.0" 0402 2031.26,4416.55 r270 top value=0.1uF
C54 "jc1.0" 0402 2666.26,4417.69 r270 top value=0.1uF
C55 "jc1.0" 0402 2031.26,4304.55 r270 top value=0.1uF
C56 "jc1.0" 0402 2666.26,4307.27 r270 top value=0.1uF
C57 "jc1.0" 0402 2031.26,4192.55 r270 top value=0.1uF
C58 "jc1.0" 0402 2666.26,4196.84 r270 top value=0.1uF
C59 "jc1.0" 0402 2031.26,4080.55 r270 top value=0.1uF
C60 "jc1.0" 0402 2666.26,4086.41 r270 top value=0.1uF
C61 "jc1.0" 0402 2031.26,3968.55 r270 top value=0.1uF
C62 "jc1.0" 0402 2666.26,3975.98 r270 top value=0.1uF
C63 "jc1.0" 0402 2031.26,3856.55 r270 top value=0.1uF
C64 "jc1.0" 0402 2666.26,3865.55 r270 top value=0.1uF
C65 "jc1.0" 0402 3286.87,4634.55 r270 top value=0.1uF
C66 "jc1.0" 0402 3920.26,4634.55 r270 top value=0.1uF
C67 "jc1.0" 0402 3286.87,4524.98 r270 top value=0.1uF
C68 "jc1.0" 0402 3920.26,4523.27 r270 top value=0.1uF
C69 "jc1.0" 0402 3286.87,4415.41 r270 top value=0.1uF
C70 "jc1.0" 0402 3920.26,4411.98 r270 top value=0.1uF
C71 "jc1.0" 0402 3286.87,4305.84 r270 top value=0.1uF
C72 "jc1.0" 0402 3920.26,4300.69 r270 top value=0.1uF
C73 "jc1.0" 0402 3286.87,4196.27 r270 top value=0.1uF
C74 "jc1.0" 0402 3920.26,4189.41 r270 top value=0.1uF
C75 "jc1.0" 0402 3286.87,4086.69 r270 top value=0.1uF
C76 "jc1.0" 0402 3920.26,4078.12 r270 top value=0.1uF
C77 "jc1.0" 0402 3286.87,3977.12 r270 top value=0.1uF
C78 "jc1.0" 0402 3920.26,3966.84 r270 top value=0.1uF
C79 "jc1.0" 0402 3286.87,3867.55 r270 top value=0.1uF
C80 "jc1.0" 0402 3920.26,3855.55 r270 top value=0.1uF
C81 "jc1.0" 0805 2872,3152 r270 bottom value=100uF
C82 "jc1.0" 0402 2933,3111 r270 bottom value=4.7uF
C83 "jc1.0" 0402 2999,2873 r270 bottom value=0.47uF
C84 "jc1.0" 0402 2864,2954 r270 bottom value=0.47uF
C85 "jc1.0" 0805 3208,2784 r90 bottom value=100uF
C86 "jc1.0" 0402 3265,3041 r180 bottom value=4.7uF
C87 "jc1.0" 0402 3315,2856 r270 bottom value=0.47uF
C88 "jc1.0" 0805 3135,2603 r180 bottom value=100uF
C89 "jc1.0" 0402 2917,2667 r180 bottom value=4.7uF
C90 "jc1.0" 0402 3089,2666 r180 bottom value=0.47uF
C91 "jc1.0" 0402 3265,2668 r180 bottom value=0.47uF
C92 "jc1.0" 0805 3198,3103 r180 bottom value=100uF
C93 "jc1.0" 0402 3001,3029 r90 bottom value=4.7uF
C94 "jc1.0" 0402 3069,2962 r0 bottom value=4.7uF
C95 "jc1.0" 0402 2814,3112 r270 bottom value=4.7uF
C96 "jc1.0" 0402 3049,2835 r90 bottom value=0.47uF
C97 "jc1.0" 0805 2683,2945 r270 bottom value=100uF
C98 "jc1.0" 0402 2705,2754.41 r90 bottom value=4.7uF
C99 "jc1.0" 0402 2705,3051 r270 bottom value=0.47uF
C100 "jc1.0" 0805 3137,3344 r180 bottom value=100uF
C101 "jc1.0" 0402 2914,3279 r180 bottom value=4.7uF
C102 "jc1.0" 0402 3090.22,3278 r180 bottom value=0.47uF
C103 "jc1.0" 0402 3265,3278 r180 bottom value=0.47uF
C104 "jc1.0" 0805 4281,2551 r0 top value=10uF@10V
C105 "jc1.0" 0805 4281,2643 r0 top value=0.1uF@10V
C106 "jc1.0" 1210 1273,3001 r270 bottom value=47uF@16V
C107 "jc1.0" 0805 1387,2956 r270 bottom value=0.1uF@16V
C108 "jc1.0" 0805 1576,2432 r270 bottom value=10uF@10V
C109 "jc1.0" 0805 1471,2432 r270 bottom value=0.1uF@10V
C110 "jc1.0" 0805 1478,2956 r270 bottom value=10uF@16V
C111 "jc1.0" 0805 1681,2432 r270 bottom value=4.7uF@10V
C112 "jc1.0" 0805 3719,2834 r90 top value=10uF@10V
C113 "jc1.0" 0805 3812,2834 r90 top value=0.1uF@10V
J1 "JAE FI-RE51S" FI-RE51S-HF 4507.87,3346.46 r90 top locked
P1 "Header 8X2" HDR2X8 1181.1,2086.61 r270 top locked
P2 "Header 8X2" HDR2X8 1811.02,2086.61 r270 top locked
P3 "Header 8X2" HDR2X8 2440.94,2086.61 r270 top locked
P4 "Header 8X2" HDR2X8 3070.87,2086.61 r270 top locked
P5 "Header 8X2" HDR2X8 3700.79,2086.61 r270 top locked
P6 "Header 8X2" HDR2X8 1181.1,4606.3 r270 top locked
P7 "Header 8X2" HDR2X8 1811.02,4606.3 r270 top locked
P8 "Header 8X2" HDR2X8 2440.94,4606.3 r270 top locked
P9 "Header 8X2" HDR2X8 3070.87,4606.3 r270 top locked
P10 "Header 8X2" HDR2X8 3700.79,4606.3 r270 top locked
P11 "FPGAJTAG" SIP6 4139,3055 r90 top
P12 "PowerPlug3" powerplug4 1121,2622.05 r90 top locked
R1 "jr1.0" 0402 1449.59,2139.26 r90 top value=100ohm
R2 "jr1.0" 0402 2077,2130.26 r90 top value=100ohm
R3 "jr1.0" 0402 1368.26,2139.18 r90 top value=6.8kohm
R4 "jr1.0" 0402 1450,2025.26 r90 top value=100ohm
R5 "jr1.0" 0402 1994.26,2130.18 r90 top value=6.8kohm
R6 "jr1.0" 0402 2077,2017.26 r90 top value=100ohm
R7 "jr1.0" 0402 1449.59,1912.61 r90 top value=100ohm
R8 "jr1.0" 0402 2076.93,1904.26 r90 top value=100ohm
R9 "jr1.0" 0402 1368.26,2025.9 r90 top value=6.8kohm
R10 "jr1.0" 0402 1449.59,1799.26 r90 top value=100ohm
R11 "jr1.0" 0402 1994.26,2017.32 r90 top value=6.8kohm
R12 "jr1.0" 0402 2077,1791.26 r90 top value=100ohm
R13 "jr1.0" 0402 1450,1686.26 r90 top value=100ohm
R14 "jr1.0" 0402 2077,1678.26 r90 top value=100ohm
R15 "jr1.0" 0402 1368.26,1912.61 r90 top value=6.8kohm
R16 "jr1.0" 0402 1449.59,1572.26 r90 top value=100ohm
R17 "jr1.0" 0402 1994.26,1904.47 r90 top value=6.8kohm
R18 "jr1.0" 0402 2076.93,1566.26 r90 top value=100ohm
R19 "jr1.0" 0402 1449.59,1459.26 r90 top value=100ohm
R20 "jr1.0" 0402 2077,1453.26 r90 top value=100ohm
R21 "jr1.0" 0402 1368.26,1799.32 r90 top value=6.8kohm
R22 "jr1.0" 0402 1449.59,1346.26 r90 top value=100ohm
R23 "jr1.0" 0402 1994.26,1791.61 r90 top value=6.8kohm
R24 "jr1.0" 0402 2076.93,1340.26 r90 top value=100ohm
R25 "jr1.0" 0402 2708,2130.26 r90 top value=100ohm
R26 "jr1.0" 0402 3334,2126.46 r90 top value=100ohm
R27 "jr1.0" 0402 1368.26,1686.04 r90 top value=6.8kohm
R28 "jr1.0" 0402 2708,2017.26 r90 top value=100ohm
R29 "jr1.0" 0402 1994.26,1678.75 r90 top value=6.8kohm
R30 "jr1.0" 0402 3334,2014.26 r90 top value=100ohm
R31 "jr1.0" 0402 2708,1904.26 r90 top value=100ohm
R32 "jr1.0" 0402 3334,1901.26 r90 top value=100ohm
R33 "jr1.0" 0402 1368.26,1572.75 r90 top value=6.8kohm
R34 "jr1.0" 0402 2708,1791.26 r90 top value=100ohm
R35 "jr1.0" 0402 1994.26,1565.9 r90 top value=6.8kohm
R36 "jr1.0" 0402 3334,1789.26 r90 top value=100ohm
R37 "jr1.0" 0402 2708,1679.26 r90 top value=100ohm
R38 "jr1.0" 0402 3333,1676.26 r90 top value=100ohm
R39 "jr1.0" 0402 1368.26,1459.47 r90 top value=6.8kohm
R40 "jr1.0" 0402 2708,1566.26 r90 top value=100ohm
R41 "jr1.0" 0402 1994.26,1453.04 r90 top value=6.8kohm
R42 "jr1.0" 0402 3333,1564.26 r90 top value=100ohm
R43 "jr1.0" 0402 2708,1453.26 r90 top value=100ohm
R44 "jr1.0" 0402 3333,1451.26 r90 top value=100ohm
R45 "jr1.0" 0402 1368.26,1346.18 r90 top value=6.8kohm
R46 "jr1.0" 0402 2708.26,1340.26 r90 top value=100ohm
R47 "jr1.0" 0402 1994.26,1340.18 r90 top value=6.8kohm
R48 "jr1.0" 0402 3333,1339.26 r90 top value=100ohm
R49 "jr1.0" 0402 3963.26,2130.26 r90 top value=100ohm
R50 "jr1.0" 0402 1440.26,4644.74 r90 top value=100ohm
R51 "jr1.0" 0402 2622.26,2130.18 r90 top value=6.8kohm
R52 "jr1.0" 0402 3963.26,2017.26 r90 top value=100ohm
R53 "jr1.0" 0402 3248.26,2126.59 r90 top value=6.8kohm
R54 "jr1.0" 0402 1440.26,4532.74 r90 top value=100ohm
R55 "jr1.0" 0402 3963.26,1904.26 r90 top value=100ohm
R56 "jr1.0" 0402 1440,4420.74 r90 top value=100ohm
R57 "jr1.0" 0402 2622.26,2017.32 r90 top value=6.8kohm
R58 "jr1.0" 0402 3963,1790.26 r90 top value=100ohm
R59 "jr1.0" 0402 3248.26,2014.02 r90 top value=6.8kohm
R60 "jr1.0" 0402 1440.26,4308.74 r90 top value=100ohm
R61 "jr1.0" 0402 3963,1677.26 r90 top value=100ohm
R62 "jr1.0" 0402 1440.26,4196.74 r90 top value=100ohm
R63 "jr1.0" 0402 2622.26,1904.47 r90 top value=6.8kohm
R64 "jr1.0" 0402 3963,1563.26 r90 top value=100ohm
R65 "jr1.0" 0402 3248.26,1901.45 r90 top value=6.8kohm
R66 "jr1.0" 0402 1440.26,4085.74 r90 top value=100ohm
R67 "jr1.0" 0402 3963,1450.26 r90 top value=100ohm
R68 "jr1.0" 0402 1440.26,3973.74 r90 top value=100ohm
R69 "jr1.0" 0402 2622.26,1791.61 r90 top value=6.8kohm
R70 "jr1.0" 0402 3963,1336.26 r90 top value=100ohm
R71 "jr1.0" 0402 3248.26,1788.88 r90 top value=6.8kohm
R72 "jr1.0" 0402 1440.26,3861.74 r90 top value=100ohm
R73 "jr1.0" 0402 2071.26,4640.74 r90 top value=100ohm
R74 "jr1.0" 0402 2707.26,4638.74 r90 top value=100ohm
R75 "jr1.0" 0402 2622.26,1678.75 r90 top value=6.8kohm
R76 "jr1.0" 0402 2071.26,4528.74 r90 top value=100ohm
R77 "jr1.0" 0402 3248.26,1676.3 r90 top value=6.8kohm
R78 "jr1.0" 0402 2707.26,4527.74 r90 top value=100ohm
R79 "jr1.0" 0402 2071,4416.74 r90 top value=100ohm
R80 "jr1.0" 0402 2707.26,4417.74 r90 top value=100ohm
R81 "jr1.0" 0402 2622.26,1565.9 r90 top value=6.8kohm
R82 "jr1.0" 0402 2071,4304.74 r90 top value=100ohm
R83 "jr1.0" 0402 3248.26,1563.73 r90 top value=6.8kohm
R84 "jr1.0" 0402 2707.26,4307.74 r90 top value=100ohm
R85 "jr1.0" 0402 2071,4192.74 r90 top value=100ohm
R86 "jr1.0" 0402 2707.26,4196.74 r90 top value=100ohm
R87 "jr1.0" 0402 2622.26,1453.04 r90 top value=6.8kohm
R88 "jr1.0" 0402 2071,4080.74 r90 top value=100ohm
R89 "jr1.0" 0402 3248.26,1451.16 r90 top value=6.8kohm
R90 "jr1.0" 0402 2707,4086.74 r90 top value=100ohm
R91 "jr1.0" 0402 2071.26,3968.74 r90 top value=100ohm
R92 "jr1.0" 0402 2707,3975.74 r90 top value=100ohm
R93 "jr1.0" 0402 2622.26,1340.18 r90 top value=6.8kohm
R94 "jr1.0" 0402 2071.26,3856.74 r90 top value=100ohm
R95 "jr1.0" 0402 3248.26,1338.59 r90 top value=6.8kohm
R96 "jr1.0" 0402 2707,3865.74 r90 top value=100ohm
R97 "jr1.0" 0402 3328,4634.74 r90 top value=100ohm
R98 "jr1.0" 0402 3961,4634.74 r90 top value=100ohm
R99 "jr1.0" 0402 3881.26,2130.59 r90 top value=6.8kohm
R100 "jr1.0" 0402 3327.87,4524.74 r90 top value=100ohm
R101 "jr1.0" 0402 1360.26,4644.55 r90 top value=6.8kohm
R102 "jr1.0" 0402 3961,4523.27 r90 top value=100ohm
R103 "jr1.0" 0402 3327.87,4415.74 r90 top value=100ohm
R104 "jr1.0" 0402 3961,4412.74 r90 top value=100ohm
R105 "jr1.0" 0402 3881.26,2017.16 r90 top value=6.8kohm
R106 "jr1.0" 0402 3327.87,4305.74 r90 top value=100ohm
R107 "jr1.0" 0402 1360.26,4532.69 r90 top value=6.8kohm
R108 "jr1.0" 0402 3961,4300.74 r90 top value=100ohm
R109 "jr1.0" 0402 3327.87,4196.74 r90 top value=100ohm
R110 "jr1.0" 0402 3961,4189.74 r90 top value=100ohm
R111 "jr1.0" 0402 3881.26,1903.73 r90 top value=6.8kohm
R112 "jr1.0" 0402 3328,4086.74 r90 top value=100ohm
R113 "jr1.0" 0402 1360.26,4420.84 r90 top value=6.8kohm
R114 "jr1.0" 0402 3961,4077.74 r90 top value=100ohm
R115 "jr1.0" 0402 3327.87,3976.74 r90 top value=100ohm
R116 "jr1.0" 0402 3961,3966.74 r90 top value=100ohm
R117 "jr1.0" 0402 3881.26,1790.3 r90 top value=6.8kohm
R118 "jr1.0" 0402 3328,3867.74 r90 top value=100ohm
R119 "jr1.0" 0402 1360.26,4308.98 r90 top value=6.8kohm
R120 "jr1.0" 0402 3961,3855.74 r90 top value=100ohm
R123 "jr1.0" 0402 3881.26,1676.88 r90 top value=6.8kohm
R125 "jr1.0" 0402 1360.26,4197.12 r90 top value=6.8kohm
R129 "jr1.0" 0402 3881.26,1563.45 r90 top value=6.8kohm
R131 "jr1.0" 0402 1360.26,4085.27 r90 top value=6.8kohm
R135 "jr1.0" 0402 3881.26,1450.02 r90 top value=6.8kohm
R137 "jr1.0" 0402 1360.26,3973.41 r90 top value=6.8kohm
R141 "jr1.0" 0402 3881.26,1336.59 r90 top value=6.8kohm
R143 "jr1.0" 0402 1360.26,3861.55 r90 top value=6.8kohm
R147 "jr1.0" 0402 1991.26,4640.55 r90 top value=6.8kohm
R149 "jr1.0" 0402 2625.26,4638.55 r90 top value=6.8kohm
R153 "jr1.0" 0402 1991.26,4528.55 r90 top value=6.8kohm
R155 "jr1.0" 0402 2625.26,4528.12 r90 top value=6.8kohm
R159 "jr1.0" 0402 1991.26,4416.55 r90 top value=6.8kohm
R161 "jr1.0" 0402 2625.26,4417.69 r90 top value=6.8kohm
R165 "jr1.0" 0402 1991.26,4304.55 r90 top value=6.8kohm
R167 "jr1.0" 0402 2625.26,4307.27 r90 top value=6.8kohm
R171 "jr1.0" 0402 1991.26,4192.55 r90 top value=6.8kohm
R173 "jr1.0" 0402 2625.26,4196.84 r90 top value=6.8kohm
R177 "jr1.0" 0402 1991.26,4080.55 r90 top value=6.8kohm
R179 "jr1.0" 0402 2625.26,4086.41 r90 top value=6.8kohm
R183 "jr1.0" 0402 1991.26,3968.55 r90 top value=6.8kohm
R185 "jr1.0" 0402 2625.26,3975.98 r90 top value=6.8kohm
R189 "jr1.0" 0402 1991.26,3856.55 r90 top value=6.8kohm
R191 "jr1.0" 0402 2625.26,3865.55 r90 top value=6.8kohm
R195 "jr1.0" 0402 3245.87,4634.55 r90 top value=6.8kohm
R197 "jr1.0" 0402 3880.26,4634.55 r90 top value=6.8kohm
R201 "jr1.0" 0402 3245.87,4524.98 r90 top value=6.8kohm
R203 "jr1.0" 0402 3880.26,4523.27 r90 top value=6.8kohm
R207 "jr1.0" 0402 3245.87,4415.41 r90 top value=6.8kohm
R209 "jr1.0" 0402 3880.26,4411.98 r90 top value=6.8kohm
R213 "jr1.0" 0402 3245.87,4305.84 r90 top value=6.8kohm
R215 "jr1.0" 0402 3880.26,4300.69 r90 top value=6.8kohm
R219 "jr1.0" 0402 3245.87,4196.27 r90 top value=6.8kohm
R221 "jr1.0" 0402 3880.26,4189.41 r90 top value=6.8kohm
R225 "jr1.0" 0402 3245.87,4086.69 r90 top value=6.8kohm
R227 "jr1.0" 0402 3880.26,4078.12 r90 top value=6.8kohm
R231 "jr1.0" 0402 3245.87,3977.12 r90 top value=6.8kohm
R233 "jr1.0" 0402 3880.26,3966.84 r90 top value=6.8kohm
R237 "jr1.0" 0402 3245.87,3867.55 r90 top value=6.8kohm
R239 "jr1.0" 0402 3880.26,3855.55 r90 top value=6.8kohm
U1 "XC6SLX9-2FTG256C" FTG256 3010.94,2972.68 r90 top locked

## Footprints (in the part's own frame and the unit in brackets; to place one, negate y for a bottom-side part, rotate by r counter-clockwise, add the part's x,y. Pads: shape width x height; smd on the part's side, far side on the other; paste and mask are expansions set on the pad)
0402 [mm] "Chip Capacitor; Body 1.0 x 0.5 mm (LxW typ)"
  rect 0.9x0.7 smd: 1(-0.65,0) 2(0.65,0)
0805 [mil]
  rect 60x50 smd: 1(0,0) 2(90,0)
  silkscreen extent -50,-40 135,40
1210 [mil]
  rect 60x100 smd: 1(0,0) 2(135,0)
  silkscreen extent -50,-70 185,70
FI-RE51S-HF [mm] "JAE, connector for Internal Serial Transmission, Right-angle, shell, 51pin"
  rect 0.25x1.55 smd: 1(-12.5,0.775) 2(-12,0.775) 3(-11.5,0.775) 4(-11,0.775) 5(-10.5,0.775) 6(-10,0.775) 7(-9.5,0.775) 8(-9,0.775) 9(-8.5,0.775) 10(-8,0.775) 11(-7.5,0.775) 12(-7,0.775) 13(-6.5,0.775) 14(-6,0.775) 15(-5.5,0.775) 16(-5,0.775) 17(-4.5,0.775) 18(-4,0.775) 19(-3.5,0.775) 20(-3,0.775) 21(-2.5,0.775) 22(-2,0.775) 23(-1.5,0.775) 24(-1,0.775) 25(-0.5,0.775) 26(0,0.775) 27(0.5,0.775) 28(1,0.775) 29(1.5,0.775) 30(2,0.775) 31(2.5,0.775) 32(3,0.775) 33(3.5,0.775) 34(4,0.775) 35(4.5,0.775) 36(5,0.775) 37(5.5,0.775) 38(6,0.775) 39(6.5,0.775) 40(7,0.775) 41(7.5,0.775) 42(8,0.775) 43(8.5,0.775) 44(9,0.775) 45(9.5,0.775) 46(10,0.775) 47(10.5,0.775) 48(11,0.775) 49(11.5,0.775) 50(12,0.775) 51(12.5,0.775)
  rect 2.5x1.55 smd: 52(-15.5,0.775) 53(-15.5,-4.325) 60(15.5,-4.325) 61(15.5,0.775)
  rect 1.3x1.55 smd: 54(-12.5,-4.324) 55(-7.5,-4.325) 56(-2.5,-4.325) 57(2.5,-4.325) 58(7.5,-4.325) 59(12.5,-4.325)
  rect 2.05x2.5 smd: 62(-18.4,-2.5) 63(18.4,-2.5)
  silkscreen extent -20,-14.2 20,1.8
FTG256 [mm] "BGA, 256-Leads, Body 17x17mm, Pitch 1mm"
  round 0.45 smd: A1(-7.5,7.5) A2(-6.5,7.5) A3(-5.5,7.5) A4(-4.5,7.5) A5(-3.5,7.5) A6(-2.5,7.5) A7(-1.5,7.5) A8(-0.5,7.5) A9(0.5,7.5) A10(1.5,7.5) A11(2.5,7.5) A12(3.5,7.5) A13(4.5,7.5) A14(5.5,7.5) A15(6.5,7.5) A16(7.5,7.5) B1(-7.5,6.5) B2(-6.5,6.5) B3(-5.5,6.5) B4(-4.5,6.5) B5(-3.5,6.5) B6(-2.5,6.5) B7(-1.5,6.5) B8(-0.5,6.5) B9(0.5,6.5) B10(1.5,6.5) B11(2.5,6.5) B12(3.5,6.5) B13(4.5,6.5) B14(5.5,6.5) B15(6.5,6.5) B16(7.5,6.5) C1(-7.5,5.5) C2(-6.5,5.5) C3(-5.5,5.5) C4(-4.5,5.5) C5(-3.5,5.5) C6(-2.5,5.5) C7(-1.5,5.5) C8(-0.5,5.5) C9(0.5,5.5) C10(1.5,5.5) C11(2.5,5.5) C12(3.5,5.5) C13(4.5,5.5) C14(5.5,5.5) C15(6.5,5.5) C16(7.5,5.5) D1(-7.5,4.5) D2(-6.5,4.5) D3(-5.5,4.5) D4(-4.5,4.5) D5(-3.5,4.5) D6(-2.5,4.5) D7(-1.5,4.5) D8(-0.5,4.5) D9(0.5,4.5) D10(1.5,4.5) D11(2.5,4.5) D12(3.5,4.5) D13(4.5,4.5) D14(5.5,4.5) D15(6.5,4.5) D16(7.5,4.5) E1(-7.5,3.5) E2(-6.5,3.5) E3(-5.5,3.5) E4(-4.5,3.5) E5(-3.5,3.5) E6(-2.5,3.5) E7(-1.5,3.5) E8(-0.5,3.5) E9(0.5,3.5) E10(1.5,3.5) E11(2.5,3.5) E12(3.5,3.5) E13(4.5,3.5) E14(5.5,3.5) E15(6.5,3.5) E16(7.5,3.5) F1(-7.5,2.5) F2(-6.5,2.5) F3(-5.5,2.5) F4(-4.5,2.5) F5(-3.5,2.5) F6(-2.5,2.5) F7(-1.5,2.5) F8(-0.5,2.5) F9(0.5,2.5) F10(1.5,2.5) F11(2.5,2.5) F12(3.5,2.5) F13(4.5,2.5) F14(5.5,2.5) F15(6.5,2.5) F16(7.5,2.5) G1(-7.5,1.5) G2(-6.5,1.5) G3(-5.5,1.5) G4(-4.5,1.5) G5(-3.5,1.5) G6(-2.5,1.5) G7(-1.5,1.5) G8(-0.5,1.5) G9(0.5,1.5) G10(1.5,1.5) G11(2.5,1.5) G12(3.5,1.5) G13(4.5,1.5) G14(5.5,1.5) G15(6.5,1.5) G16(7.5,1.5) H1(-7.5,0.5) H2(-6.5,0.5) H3(-5.5,0.5) H4(-4.5,0.5) H5(-3.5,0.5) H6(-2.5,0.5) H7(-1.5,0.5) H8(-0.5,0.5) H9(0.5,0.5) H10(1.5,0.5) H11(2.5,0.5) H12(3.5,0.5) H13(4.5,0.5) H14(5.5,0.5) H15(6.5,0.5) H16(7.5,0.5) J1(-7.5,-0.5) J2(-6.5,-0.5) J3(-5.5,-0.5) J4(-4.5,-0.5) J5(-3.5,-0.5) J6(-2.5,-0.5) J7(-1.5,-0.5) J8(-0.5,-0.5) J9(0.5,-0.5) J10(1.5,-0.5) J11(2.5,-0.5) J12(3.5,-0.5) J13(4.5,-0.5) J14(5.5,-0.5) J15(6.5,-0.5) J16(7.5,-0.5) K1(-7.5,-1.5) K2(-6.5,-1.5) K3(-5.5,-1.5) K4(-4.5,-1.5) K5(-3.5,-1.5) K6(-2.5,-1.5) K7(-1.5,-1.5) K8(-0.5,-1.5) K9(0.5,-1.5) K10(1.5,-1.5) K11(2.5,-1.5) K12(3.5,-1.5) K13(4.5,-1.5) K14(5.5,-1.5) K15(6.5,-1.5) K16(7.5,-1.5) L1(-7.5,-2.5) L2(-6.5,-2.5) L3(-5.5,-2.5) L4(-4.5,-2.5) L5(-3.5,-2.5) L6(-2.5,-2.5) L7(-1.5,-2.5) L8(-0.5,-2.5) L9(0.5,-2.5) L10(1.5,-2.5) L11(2.5,-2.5) L12(3.5,-2.5) L13(4.5,-2.5) L14(5.5,-2.5) L15(6.5,-2.5) L16(7.5,-2.5) M1(-7.5,-3.5) M2(-6.5,-3.5) M3(-5.5,-3.5) M4(-4.5,-3.5) M5(-3.5,-3.5) M6(-2.5,-3.5) M7(-1.5,-3.5) M8(-0.5,-3.5) M9(0.5,-3.5) M10(1.5,-3.5) M11(2.5,-3.5) M12(3.5,-3.5) M13(4.5,-3.5) M14(5.5,-3.5) M15(6.5,-3.5) M16(7.5,-3.5) N1(-7.5,-4.5) N2(-6.5,-4.5) N3(-5.5,-4.5) N4(-4.5,-4.5) N5(-3.5,-4.5) N6(-2.5,-4.5) N7(-1.5,-4.5) N8(-0.5,-4.5) N9(0.5,-4.5) N10(1.5,-4.5) N11(2.5,-4.5) N12(3.5,-4.5) N13(4.5,-4.5) N14(5.5,-4.5) N15(6.5,-4.5) N16(7.5,-4.5) P1(-7.5,-5.5) P2(-6.5,-5.5) P3(-5.5,-5.5) P4(-4.5,-5.5) P5(-3.5,-5.5) P6(-2.5,-5.5) P7(-1.5,-5.5) P8(-0.5,-5.5) P9(0.5,-5.5) P10(1.5,-5.5) P11(2.5,-5.5) P12(3.5,-5.5) P13(4.5,-5.5) P14(5.5,-5.5) P15(6.5,-5.5) P16(7.5,-5.5) R1(-7.5,-6.5) R2(-6.5,-6.5) R3(-5.5,-6.5) R4(-4.5,-6.5) R5(-3.5,-6.5) R6(-2.5,-6.5) R7(-1.5,-6.5) R8(-0.5,-6.5) R9(0.5,-6.5) R10(1.5,-6.5) R11(2.5,-6.5) R12(3.5,-6.5) R13(4.5,-6.5) R14(5.5,-6.5) R15(6.5,-6.5) R16(7.5,-6.5) T1(-7.5,-7.5) T2(-6.5,-7.5) T3(-5.5,-7.5) T4(-4.5,-7.5) T5(-3.5,-7.5) T6(-2.5,-7.5) T7(-1.5,-7.5) T8(-0.5,-7.5) T9(0.5,-7.5) T10(1.5,-7.5) T11(2.5,-7.5) T12(3.5,-7.5) T13(4.5,-7.5) T14(5.5,-7.5) T15(6.5,-7.5) T16(7.5,-7.5)
  silkscreen extent -9.27,-8.5 8.5,8.5, body extent -8.5,-8.5 8.5,8.5, height 1.55
HDR2X8 [mm] "Connector; Header; 8x2 Position"
  rect 1.5x1.5 hole 0.9: 1(0,0)
  round 1.5 hole 0.9: 2(0,2.54) 3(2.54,0) 4(2.54,2.54) 5(5.08,0) 6(5.08,2.54) 7(7.62,0) 8(7.62,2.54) 9(10.16,0) 10(10.16,2.54) 11(12.7,0) 12(12.7,2.54) 13(15.24,0) 14(15.24,2.54) 15(17.78,0) 16(17.78,2.54)
  silkscreen extent -1.27,-1.27 19.05,3.81
powerplug4 [mm]
  round 2 hole 1.2: 1(-2.75,0) 2(2.75,0) 3(-2.75,-6.5) 4(2.75,-6.5)
  silkscreen extent -5.5,1.6 5.5,16.6
SIP6 [mil]
  rect 50x50 hole 32: 1(0,0)
  round 50 hole 32: 2(100,0) 3(200,0) 4(300,0) 5(400,0) 6(500,0)
  silkscreen extent -50,-50 550,50
SMA_2 [mm]
  round 2.1 hole 1.5: 1(0,0) 2(2.5,2.5) 3(2.5,-2.5) 4(-2.5,-2.5) 5(-2.5,2.5)
  silkscreen extent -3.81,-3.81 3.81,3.81

## Part data
C1 C2 C3 C4 C5 C6 C7 C8 C9 C10 C11 C12 C13 C14 C15 C16 C17 C18 C19 C20 C21 C22 C23 C24 C25 C26 C27 C28 C29 C30 C31 C32 C33 C34 C35 C36 C37 C38 C39 C40 C41 C42 C43 C44 C45 C46 C47 C48 C49 C50 C51 C52 C53 C54 C55 C56 C57 C58 C59 C60 C61 C62 C63 C64 C65 C66 C67 C68 C69 C70 C71 C72 C73 C74 C75 C76 C77 C78 C79 C80 C81 C82 C83 C84 C85 C86 C87 C88 C89 C90 C91 C92 C93 C94 C95 C96 C97 C98 C99 C100 C101 C102 C103 C104 C105 C106 C107 C108 C109 C110 C111 C112 C113: library part Cap, "Capacitor", LatestRevisionDate=17-Jul-2002, LatestRevisionNote="Re-released for DXP Platform.", PackageReference=RAD-0.3, Published=8-Jun-2000, Publisher="Altium Limited"
P1 P2 P3 P4 P5 P6 P7 P8 P9 P10: "Header, 8-Pin, Dual row", LatestRevisionDate=17-Jul-2002, LatestRevisionNote="Re-released for DXP Platform.", Publisher="Altium Limited"
P11: library part FPGAJTAGHEADER
P12: library part PowerPlug4
R1 R2 R3 R4 R5 R6 R7 R8 R9 R10 R11 R12 R13 R14 R15 R16 R17 R18 R19 R20 R21 R22 R23 R24 R25 R26 R27 R28 R29 R30 R31 R32 R33 R34 R35 R36 R37 R38 R39 R40 R41 R42 R43 R44 R45 R46 R47 R48 R49 R50 R51 R52 R53 R54 R55 R56 R57 R58 R59 R60 R61 R62 R63 R64 R65 R66 R67 R68 R69 R70 R71 R72 R73 R74 R75 R76 R77 R78 R79 R80 R81 R82 R83 R84 R85 R86 R87 R88 R89 R90 R91 R92 R93 R94 R95 R96 R97 R98 R99 R100 R101 R102 R103 R104 R105 R106 R107 R108 R109 R110 R111 R112 R113 R114 R115 R116 R117 R118 R119 R120 R123 R125 R129 R131 R135 R137 R141 R143 R147 R149 R153 R155 R159 R161 R165 R167 R171 R173 R177 R179 R183 R185 R189 R191 R195 R197 R201 R203 R207 R209 R213 R215 R219 R221 R225 R227 R231 R233 R237 R239: library part Res, "Resistor", LatestRevisionDate=04-Mar-2005, LatestRevisionNote="PCB Footprint replaced.", PackageReference=J1-0603, Published=8-Jun-2000, Publisher="Altium Limited"
U1: "Spartan-6 LX 1.2V FPGA, 186 User I/Os, 256-Ball Fine-Pitch Thin BGA (1.0mm Pitch), Speed Grade 2, Commercial Grade, Pb-Free", Code_JEDEC=MS-034-AAF-1*, ComponentLink1Description="Manufacturer URL", ComponentLink1URL=http://www.xilinx.com/, ComponentLink2Description="Spartan-6 Datasheet", ComponentLink2URL=http://www.xilinx.com/support/documentation/data_sheets/ds160.pdf, ComponentLink3Description="Spartan-6 Documents", ComponentLink3URL=http://www.xilinx.com/support/documentation/spartan-6.htm, DatasheetVersion="ver1.6, Nov-2010", PackageDescription="256-Ball Fine Pitch Thin Ball Grid Array 1.00 mm Pitch (FTG256) - Pb-Free", PackageReference=FTG256, PackageVersion="ver1.3, Oct-2007"

## Free pads (board coordinates)
  round 157.48 hole 98.43: 0(905.51,1102.36) 0(905.51,4803.15) 0(4606.3,1102.36) 0(4606.3,4803.15)

## Via types
v1: diameter 12, hole 6, Top Layer to Bottom Layer, 347 vias
v2: diameter 50, hole 28, Top Layer to Bottom Layer, 10 vias

## Nets (pads, with @x,y where several pads share a name; then routed paths per layer and width w, separated by ;. In a path a pad name is that pad's centre, name@x,y a point inside that pad or via, vN(x,y) a via of type N, cw(c..) or ccw(c..) an arc to the next point about the centre after c; other vN are vias at no path point)
+1.2V: C88.2 C89.2 C90.2 C91.2 C92.2 C93.2 C94.2 C95.2 C96.2 C97.2 C98.2 C99.2 C100.2 C101.2 C102.2 C103.2 J1.21 J1.22 J1.23 J1.24 U1.B4 U1.B9 U1.B13 U1.D2 U1.D7 U1.D10 U1.D15 U1.G4 U1.G7 U1.G9 U1.G13 U1.H8 U1.H10 U1.J2 U1.J7 U1.J9 U1.J15 U1.K4 U1.K8 U1.K10 U1.K13 U1.N2 U1.N15 U1.R13 | length 1575
  Top Layer w10: v1(2735,2815) 2735.56,2815 U1.B4@2755.04,2795.52 ; v1(2735,3012) 2754.63,2992.37 U1.B9@2755.04,2992.37 ; v1(2735,3169) 2735.89,3169 U1.B13@2755.04,3149.85 ; v1(2813.82,2933.04) 2814.37,2933.04 U1.D7@2833.78,2913.63 ; v1(2814.3,3051) 2833.56,3031.74 U1.D10@2833.78,3031.74 ; U1.D2@2833.78,2716.78 2853.56,2697 v1(2854,2697) ; U1.D15@2833.78,3228.59 2853,3247.81 v1(2853,3248) ; v1(2931.93,2894) 2951.56,2913.63 U1.G7@2951.89,2913.63 ; v1(2932,2815) 2951.48,2795.52 U1.G4@2951.89,2795.52 ; v1(2932,3011.96) 2932.3,3011.96 U1.G9@2951.89,2992.37 ; U1.G13@2951.89,3149.85 v1(2971,3169) ; v1(2972,2933.04) 2991.26,2952.3 U1.H8@2991.26,2953 ; v1(2972,3051) U1.H10@2991.26,3031.74 ; U1.J2@3030.63,2716.78 3050,2697.41 v1(3050,2697) ; U1.J7@3030.63,2913.63 3050,2894.26 v1(3050,2894) ; U1.J9@3030.63,2992.37 3050,3011.74 v1(3050,3012) ; U1.J15@3030.63,3228.59 v1(3050,3248) ; v1(3050,3169) 3050.85,3169 U1.K13@3070,3149.85 ; U1.K4@3070,2795.52 3070.26,2795.52 v1(3089.78,2776) ; U1.K8@3070,2953 3089.63,2933.37 v1(3089.63,2933.04) ; U1.K10@3070,3031.74 3070.52,3031.74 v1(3089.78,3051) ; U1.N2@3188.11,2716.78 3188.22,2716.78 v1(3208,2697) ; U1.N15@3188.11,3228.59 3188.59,3228.59 v1(3208,3248) ; U1.R13@3266.85,3149.85 3267.33,3149.85 v1(3286.48,3169) ; v1(4433,3268) 4433.28,3267.72 J1.22@4477.36,3267.72 ; v1(4433,3288) 4433.6,3287.4 J1.23@4477.36,3287.4 ; v1(4433,3307) 4433.09,3307.09 J1.24@4477.36,3307.09 ; v1(4433,3248) J1.21@4477.36,3248.03
  Bottom Layer w10: C97.2@2683,2841 2705,2819 ; C98.2@2705,2780 2705,2819 ; C99.2@2705,3025.41 2718.41,3012 v1(2735,3012) ; v1(2735,2815) 2709,2815 2705,2819 ; C95.2@2814,3086.41 2814.3,3086.11 v1(2814.3,3051) ; v1(2853,3248) 2884,3279 C101.2@2888.41,3279 ; v1(2854,2697) 2884,2667 C89.2@2891.41,2667 ; v1(2972,3051) 2997.41,3051 C93.2@3001,3054.59 ; C88.2@3045,2603 3063.41,2621.41 C90.2@3063.41,2666 3050,2679.41 v1(3050,2697) ; C100.2@3047,3344 3064.63,3326.37 C102.2@3064.63,3278 3050,3263.37 v1(3050,3248) ; C96.2@3049,2860.59 3050,2861.59 v1(3050,2894) ; v1(3089.63,2933.04) 3089.63,2957.04 C94.2@3094.59,2962 ; v1(3089.78,3051) 3089.78,3084.78 C92.2@3108,3103 ; v1(3208,2697) 3237,2668 C91.2@3239.41,2668 ; v1(3208,3248) 3209.41,3248 C103.2@3239.41,3278
+3.3V: C81.2 C82.2 C83.2 C84.2 C85.2 C86.2 C87.2 J1.27 J1.28 J1.29 J1.30 P11.1 U1.E5 U1.F8 U1.F11 U1.G10 U1.H6 U1.J10 U1.L6 U1.L9 U1.N7 U1.N10 U1.R4 U1.R8 | length 793.5
  Top Layer w8: v1(4433,3366) 4433.14,3366.14 J1.27@4477.36,3366.14 ; v1(4433,3386) 4433.17,3385.83 J1.28@4477.36,3385.83 ; v1(4433,3406) 4433.49,3405.51 J1.29@4477.36,3405.51 ; v1(4433,3425) 4433.2,3425.2 J1.30@4477.36,3425.2
  Top Layer w10: U1.E5@2873.15,2834.89 v1(2893,2815) ; v1(2893,2933) 2912.52,2952.52 U1.F8@2912.52,2953 ; U1.F11@2912.52,3071.48 U1.F11@2912.52,3071.11 2912.52,3070.41 v1(2931.93,3051) 2951.19,3031.74 U1.G10@2951.89,3031.74 ; v1(2972,2855) U1.H6@2991.26,2874.26 ; U1.J10@3030.63,3031.74 3030.74,3031.74 v1(3050,3051) ; U1.L6@3109.37,2874.26 3129,2854.63 v1(3129,2854) ; U1.L9@3109.37,2992.37 3109.37,2992.55 v1(3128.78,3011.96) ; v1(3168,2894) 3168.48,2894 U1.N7@3188.11,2913.63 ; U1.N10@3188.11,3031.74 3207,3050.63 v1(3207,3051) ; v1(3246.48,2972.44) 3247.41,2972.44 U1.R8@3266.85,2953 U1.R8@3267.48,2953 ; U1.R4@3266.85,2795.52 3266.85,2795.85 v1(3286,2815)
  Bottom Layer w10: C84.2@2864,2928.41 2868.59,2933 v1(2893,2933) ; C81.2@2872,3062 2883,3051 v1(2931.93,3051) 2931.93,3084.34 C82.2@2933,3085.41 ; v1(2972,2855) 2991.41,2855 C83.2@2999,2847.41 ; v1(3207,3051) 3217,3041 C86.2@3239.41,3041 ; v1(3286,2815) 3299.59,2815 C87.2@3315,2830.41
  Bottom Layer w16: v1(3168,2894) 3188,2894 C85.2@3208,2874
-5.2V: C104.2 C105.2 J1.9 J1.10 R3.1 R5.1 R9.1 R11.1 R15.1 R17.1 R21.1 R23.1 R27.1 R29.1 R33.1 R35.1 R39.1 R41.1 R45.1 R47.1 R51.1 R53.1 R57.1 R59.1 R63.1 R65.1 R69.1 R71.1 R75.1 R77.1 R81.1 R83.1 R87.1 R89.1 R93.1 R95.1 R99.1 R101.1 R105.1 R107.1 R111.1 R113.1 R117.1 R119.1 R123.1 R125.1 R129.1 R131.1 R135.1 R137.1 R141.1 R143.1 R147.1 R149.1 R153.1 R155.1 R159.1 R161.1 R165.1 R167.1 R171.1 R173.1 R177.1 R179.1 R183.1 R185.1 R189.1 R191.1 R195.1 R197.1 R201.1 R203.1 R207.1 R209.1 R213.1 R215.1 R219.1 R221.1 R225.1 R227.1 R231.1 R233.1 R237.1 R239.1 | length 242
  Top Layer w8: v1(4433,3011.74) 4433.07,3011.81 J1.9@4477.36,3011.81 ; v1(4433,3032) 4433.5,3031.5 J1.10@4477.36,3031.5
  Top Layer w30: C104.2@4371,2551 C105.2@4371,2643 v2(4371,2704)
  other v1: 3249.26,1311.59 3883.26,1311.59 2623.26,1312.59 1998.26,1314.59 1370.26,1319.59 3883.26,1423.59 3250.26,1424.59 1998.26,1425.59 2624.26,1428.59 1370.26,1433.59 3249.26,1536.59 3883.26,1537.59 2620.26,1538.59 1998.26,1539.59 1370.26,1545.59 3246.26,1649.59 3883.26,1650.59 2622.26,1651.59 1998.26,1653.59 1370.26,1660.59 3250.26,1762.59 3883.26,1763.59 1998.26,1765.59 2624.26,1766.02 1370.26,1772.59 3249.26,1875.59 3883.26,1877.59 1998.26,1878.59 2622.26,1878.59 1370.26,1886.59 3247.26,1988.59 3883.26,1990.59 1998.26,1991.59 2622.26,1992.59 1370.26,1999.59 3247.26,2100.59 2623.26,2103.59 1998.26,2104.59 3883.26,2104.59 1370.26,2112.59 1991.26,3829.55 3880.26,3829.55 1360.26,3835.55 2628.26,3839.55 3248.87,3839.55 3880.26,3940.55 1991.26,3942.55 2628.26,3947.55 1360.26,3948.55 3248.87,3950.55 3879.26,4051.55 1991.26,4054.3 2628.26,4058.55 3248.87,4058.55 1360.26,4060.82 3879.26,4163.55 1991.26,4166.55 2628.26,4170.55 3248.87,4170.55 1360.26,4171.55 3879.26,4273.55 1991.26,4277.55 3248.87,4279.55 2628.26,4282.55 1360.26,4283.55 3879.26,4385.55 3248.87,4388.55 1991.26,4390.55 2628.26,4390.55 1360.26,4395.55 3248.87,4498.55 3879.26,4498.55 1991.26,4502.55 2628.26,4502.55 1360.26,4507.55 3248.87,4608.55 3878.26,4608.55 2628.26,4611.55 1991.26,4614.55 1360.26,4618.55
-7V: C106.2 C107.2 C110.2 J1.3 J1.4 J1.5 J1.6 P12.2 | length 3940.1
  Top Layer w10: v1(4433,2893.41) 4433.29,2893.7 J1.3@4477.36,2893.7 ; v1(4433,2913) 4433.39,2913.39 J1.4@4477.36,2913.39 ; v1(4433,2953) 4433.24,2952.76 J1.6@4477.36,2952.76 ; v1@4433.03,2933.07 J1.5@4477.36,2933.07
  Bottom Layer w30: C106.2@1273,2866 C107.2@1387,2866 C110.2@1478,2866
  Bottom Layer w60: P12.2@1121,2730.32 1256.68,2866 C106.2@1273,2866 ; C110.2@1478,2866 2045,2866 2435,2476 3685,2476 4102.41,2893.41 v1(4433,2893.41) v1(4433,2913) v1(4433,2933.04) v1(4433,2953)
calin_LVCMOS12: B1.1 U1.C10 | length 2009.2
  Top Layer w10: v1(2774.89,3012) 2774.89,3012.22 U1.C10@2794.41,3031.74 U1.C10@2793.71,3031.74
  Signal Layer 2 w4: B1.1@974,3446 1944,3446 2358,3032 2754.89,3032 v1(2774.89,3012)
calout_LVCMOS12: B2.1 U1.C9 | length 1876.7
  Top Layer w10: v1(2774.89,2973) 2775.04,2973 U1.C9@2794.41,2992.37 U1.C9@2794.11,2992.37
  Signal Layer 2 w4: B2.1@977,3096 2182,3096 2286,2992 2755.89,2992 v1(2774.89,2973)
CLK_LVDS33_N: J1.43 U1.M9 | length 1625.7
  Top Layer w8: U1.M9@3148.74,2992.37 3168,3011.63 v1(3168,3012) ; v1(4433,3681) 4433.1,3681.1 J1.43@4477.36,3681.1
  Signal Layer 1 w4: v1(3168,3012) 3182,2998 3339.03,2998 4018.24,3677.21 4429.21,3677.21 v1(4433,3681)
CLK_LVDS33_P: J1.42 U1.N8 | length 1626
  Top Layer w8: v1(3168,2972.44) 3168.67,2972.44 U1.N8@3188.11,2953 ; v1(4433,3661.42) J1.42@4477.36,3661.42
  Signal Layer 1 w4: v1(3168,2972.44) 3181.56,2986 3344,2986 4023.21,3665.21 4429.21,3665.21 v1(4433,3661.42)
DATA_LVDS33_N: J1.49 U1.T11 | length 1479.5
  Top Layer w4: U1.T11@3306.22,3071.11 3314.33,3063 3463.86,3063 4195.23,3794.37 4440.01,3794.37 4444.85,3799.21 J1.49@4477.36,3799.21
DATA_LVDS33_P: J1.48 U1.R11 | length 1523
  Top Layer w4: U1.R11@3266.85,3071.11 3277.71,3071.11 3295.82,3053 3468,3053 4199.37,3784.37 4440.01,3784.37 4444.85,3779.53 J1.48@4477.36,3779.53
FB_LVDS33_N: J1.46 U1.T9 | length 1487
  Top Layer w4: U1.T9@3306.22,2992.37 3313.59,2985 3460.86,2985 4211.17,3735.32 4440.01,3735.32 4444.85,3740.16 J1.46@4477.36,3740.16
FB_LVDS33_P: J1.45 U1.R9 | length 1530.5
  Top Layer w4: U1.R9@3266.85,2992.37 3277.71,2992.37 3295.08,2975 3465,2975 4215.31,3725.32 4440.01,3725.32 4444.85,3720.47 J1.45@4477.36,3720.47
GND: B1.2 B1.3 B1.4 B1.5 B2.2 B2.3 B2.4 B2.5 C81.1 C82.1 C83.1 C84.1 C85.1 C86.1 C87.1 C88.1 C89.1 C90.1 C91.1 C92.1 C93.1 C94.1 C95.1 C96.1 C97.1 C98.1 C99.1 C100.1 C101.1 C102.1 C103.1 C104.1 C105.1 C106.1 C107.1 C108.1 C109.1 C110.1 C111.1 C112.1 C113.1 J1.1 J1.2 J1.7 J1.8 J1.11 J1.12 J1.15 J1.16 J1.19 J1.20 J1.25 J1.26 J1.31 J1.32 J1.37 J1.38 J1.41 J1.44 J1.47 J1.50 J1.51 P1.1 P1.3 P1.5 P1.7 P1.9 P1.11 P1.13 P1.15 P2.1 P2.3 P2.5 P2.7 P2.9 P2.11 P2.13 P2.15 P3.1 P3.3 P3.5 P3.7 P3.9 P3.11 P3.13 P3.15 P4.1 P4.3 P4.5 P4.7 P4.9 P4.11 P4.13 P4.15 P5.1 P5.3 P5.5 P5.7 P5.9 P5.11 P5.13 P5.15 P6.1 P6.3 P6.5 P6.7 P6.9 P6.11 P6.13 P6.15 P7.1 P7.3 P7.5 P7.7 P7.9 P7.11 P7.13 P7.15 P8.1 P8.3 P8.5 P8.7 P8.9 P8.11 P8.13 P8.15 P9.1 P9.3 P9.5 P9.7 P9.9 P9.11 P9.13 P9.15 P10.1 P10.3 P10.5 P10.7 P10.9 P10.11 P10.13 P10.15 P11.2 P12.3 U1.A1 U1.A16 U1.B7 U1.B11 U1.D4 U1.D13 U1.E9 U1.G2 U1.G8 U1.G15 U1.H7 U1.H9 U1.H12 U1.J5 U1.J8 U1.K7 U1.K9 U1.L2 U1.L15 U1.M8 U1.N13 U1.P3 U1.R6 U1.R10 U1.T1 U1.T16 | length 3764.6
  Top Layer w8: J1.1@4477.36,2854.33 4521.67,2854.33 v1(4522,2854) ; J1.2@4477.36,2874.02 v1(4522,2874) ; J1.7@4477.36,2972.44 v1(4522,2972.44) ; J1.8@4477.36,2992.13 4521.87,2992.13 v1(4522,2992) ; J1.11@4477.36,3051.18 4521.82,3051.18 v1(4522,3051) ; J1.12@4477.36,3070.87 4521.87,3070.87 v1(4522,3071) ; J1.15@4477.36,3129.92 4521.92,3129.92 v1(4522,3130) ; J1.16@4477.36,3149.61 4521.61,3149.61 v1(4522,3150) ; J1.19@4477.36,3208.66 4521.66,3208.66 v1(4522,3209) ; J1.20@4477.36,3228.35 4521.65,3228.35 v1(4522,3228) ; J1.25@4477.36,3326.77 4521.77,3326.77 v1(4522,3327) ; J1.26@4477.36,3346.46 4521.46,3346.46 v1(4522,3347) ; J1.31@4477.36,3444.88 4521.88,3444.88 v1(4522,3445) ; J1.32@4477.36,3464.57 4521.57,3464.57 v1(4522,3465) ; J1.37@4477.36,3562.99 v1(4522,3563) ; J1.38@4477.36,3582.68 4521.68,3582.68 v1(4522,3583) ; J1.41@4477.36,3641.73 4521.73,3641.73 v1(4522,3642) ; J1.44@4477.36,3700.79 4521.79,3700.79 v1(4522,3701) ; J1.47@4477.36,3759.84 4521.84,3759.84 v1(4522,3760) ; J1.50@4477.36,3818.9 4521.9,3818.9 v1(4522,3819) ; J1.51@4477.36,3838.58 4477.94,3838 v1(4522,3838)
  Top Layer w10: v1(2691,2677.41) U1.A1@2715.67,2677.41 ; v1(2691,3268) v1(2691,3268) U1.A16@2715.67,3267.96 ; v1(2735,2933) 2735.67,2933 U1.B7@2755.04,2913.63 ; v1(2735,3090) 2736.15,3090 U1.B11@2755.04,3071.11 ; v1(2813.82,3170) 2833.78,3150.04 U1.D13@2833.78,3149.85 ; v1(2814,2815) 2814.3,2815 U1.D4@2833.78,2795.52 ; v1(2853.56,3012) U1.E9@2873.15,2992.37 ; v1(2931.93,2933) U1.G8@2951.89,2953 ; U1.G2@2951.89,2716.78 2952.22,2716.78 v1(2972,2697) ; U1.G15@2951.89,3228.59 2971,3247.7 v1(2971,3248) ; v1(2972,2893.41) 2991.26,2912.67 U1.H7@2991.26,2913.63 ; v1(2972,3011.74) 2991.26,2992.48 U1.H9@2991.26,2992.37 ; v1(2972,3129.63) 2991.15,3110.48 U1.H12@2991.26,3110.48 ; v1(3011,2815) 3030.63,2834.63 U1.J5@3030.63,2834.89 ; U1.J8@3030.63,2953 3050,2933.63 v1(3050,2933.04) ; U1.K7@3070,2913.63 3089.63,2894 v1(3089.78,2894) ; U1.K9@3070,2992.37 3070.41,2992.37 v1(3090,3011.96) ; U1.L2@3109.37,2716.78 3129,2697.15 v1(3129,2697) ; U1.L15@3109.37,3228.59 3128.78,3248 v1(3129,3248) ; v1(3129,2933) 3148.74,2952.74 U1.M8@3148.74,2953 U1.M8@3150,2953 ; U1.N13@3188.11,3149.85 3207.26,3169 v1(3208,3169) ; v1(3208,2737) 3208.33,2737 U1.P3@3227.48,2756.15 ; U1.R6@3266.85,2874.26 3286,2893.41 v1(3286,2894) ; U1.R10@3266.85,3032.37 U1.R10@3266.85,3031.74 3267.74,3031.74 v1(3286.48,3013) ; U1.T1@3306.22,2677.41 3329.59,2677.41 v1(3330,2677) ; U1.T16@3306.22,3267.96 3306.96,3267.96 v1(3326,3287)
  Top Layer w30: v2(3661,2834) C112.1@3719,2834 C113.1@3812,2834 ; C104.1@4281,2551 C105.1@4281,2643 v2(4281,2704)
  Bottom Layer w10: C97.1@2683,2931 2685,2933 v1(2735,2933) ; v1(2691,2677.41) 2705,2691.41 C98.1@2705,2728.82 ; C99.1@2705,3076.59 2718.41,3090 v1(2735,3090) ; C95.1@2814.3,3137.89 C95.1@2814,3137.59 2814,3169.82 v1(2813.82,3170) 2854,3170 C81.1@2872,3152 C81.1@2857.59,3137.59 ; v1(2853.56,3012) 2853.56,2990.03 C84.1@2864,2979.59 ; C82.1@2933,3136.59 2939.96,3129.63 v1(2972,3129.63) ; C101.1@2939.59,3279 2970.59,3248 v1(2971,3248) ; C89.1@2942.59,2667 2972,2696.41 v1(2972,2697) ; v1(2972,2893.41) 2993.82,2893.41 C83.1@2999,2898.59 ; v1(2972,3011.74) 2992.67,3011.74 C93.1@3001,3003.41 ; v1(3011,2815) 3043.41,2815 C96.1@3049,2809.41 ; C94.1@3043.41,2962 3050,2955.41 v1(3050,2933.04) ; v1(3129,2697) 3129,2680.41 C90.1@3114.59,2666 3114.59,2623.41 C88.1@3135,2603 ; v1(3129,3248) 3129,3264.81 C102.1@3115.81,3278 3115.81,3322.81 C100.1@3137,3344 ; C92.1@3198,3103 3208,3113 v1(3208,3169) ; v1(3286,2894) 3302.59,2894 C87.1@3315,2881.59 ; v1(3286.48,3013) 3286.48,3036.89 C86.1@3290.59,3041 ; C91.1@3290.59,2668 3321,2668 v1(3330,2677) ; C103.1@3290.59,3278 3299.59,3287 v1(3326,3287)
  Bottom Layer w30: B2.3@1075.43,2997.57 1269.57,2997.57 C106.1@1273,3001 1342,3001 C107.1@1387,2956 C110.1@1478,2956 ; P12.3@1376.91,2513.78 1458.69,2432 C111.1@1681,2432 ; v1(3208,2737) C85.1@3208,2784
P1S1_ECL: C1.1 P1.2 R3.2 | length 160.2
  Top Layer w10: P1.2@1281.1,2086.61 1359.26,2164.77 R3.2@1368.26,2164.77 C1.1@1408.93,2164.77
P1S1_LVCMOS12: C1.2 R1.1 U1.A10 | length 1687
  Top Layer w4: R1.1@1449.59,2113.67 2367.66,3031.74 U1.A10@2715.67,3031.74
  Top Layer w10: C1.2@1408.93,2113.59 R1.1@1449.59,2113.59
P1S2_ECL: C3.1 P1.4 R9.2 | length 154.7
  Top Layer w10: P1.4@1281.1,1986.61 1345.97,2051.49 R9.2@1368.26,2051.49 C3.1@1408.93,2051.49